# Altium PCB ALTAIR_PD_Squad_V26.5a_cut.PcbDoc (part 1 of 4)
Units mm, origin at the board's own origin, x right, y up, seen from the top; angles counter-clockwise.
Board outline 74 x 56 mm, 4 copper layers (Top Layer, Layer 2, Layer 3, Bottom Layer), stack 1.818 mm thick; 213 components, 155 nets, 610 pads, 404 vias.
Unrouted connection lines stored in the file: 6.
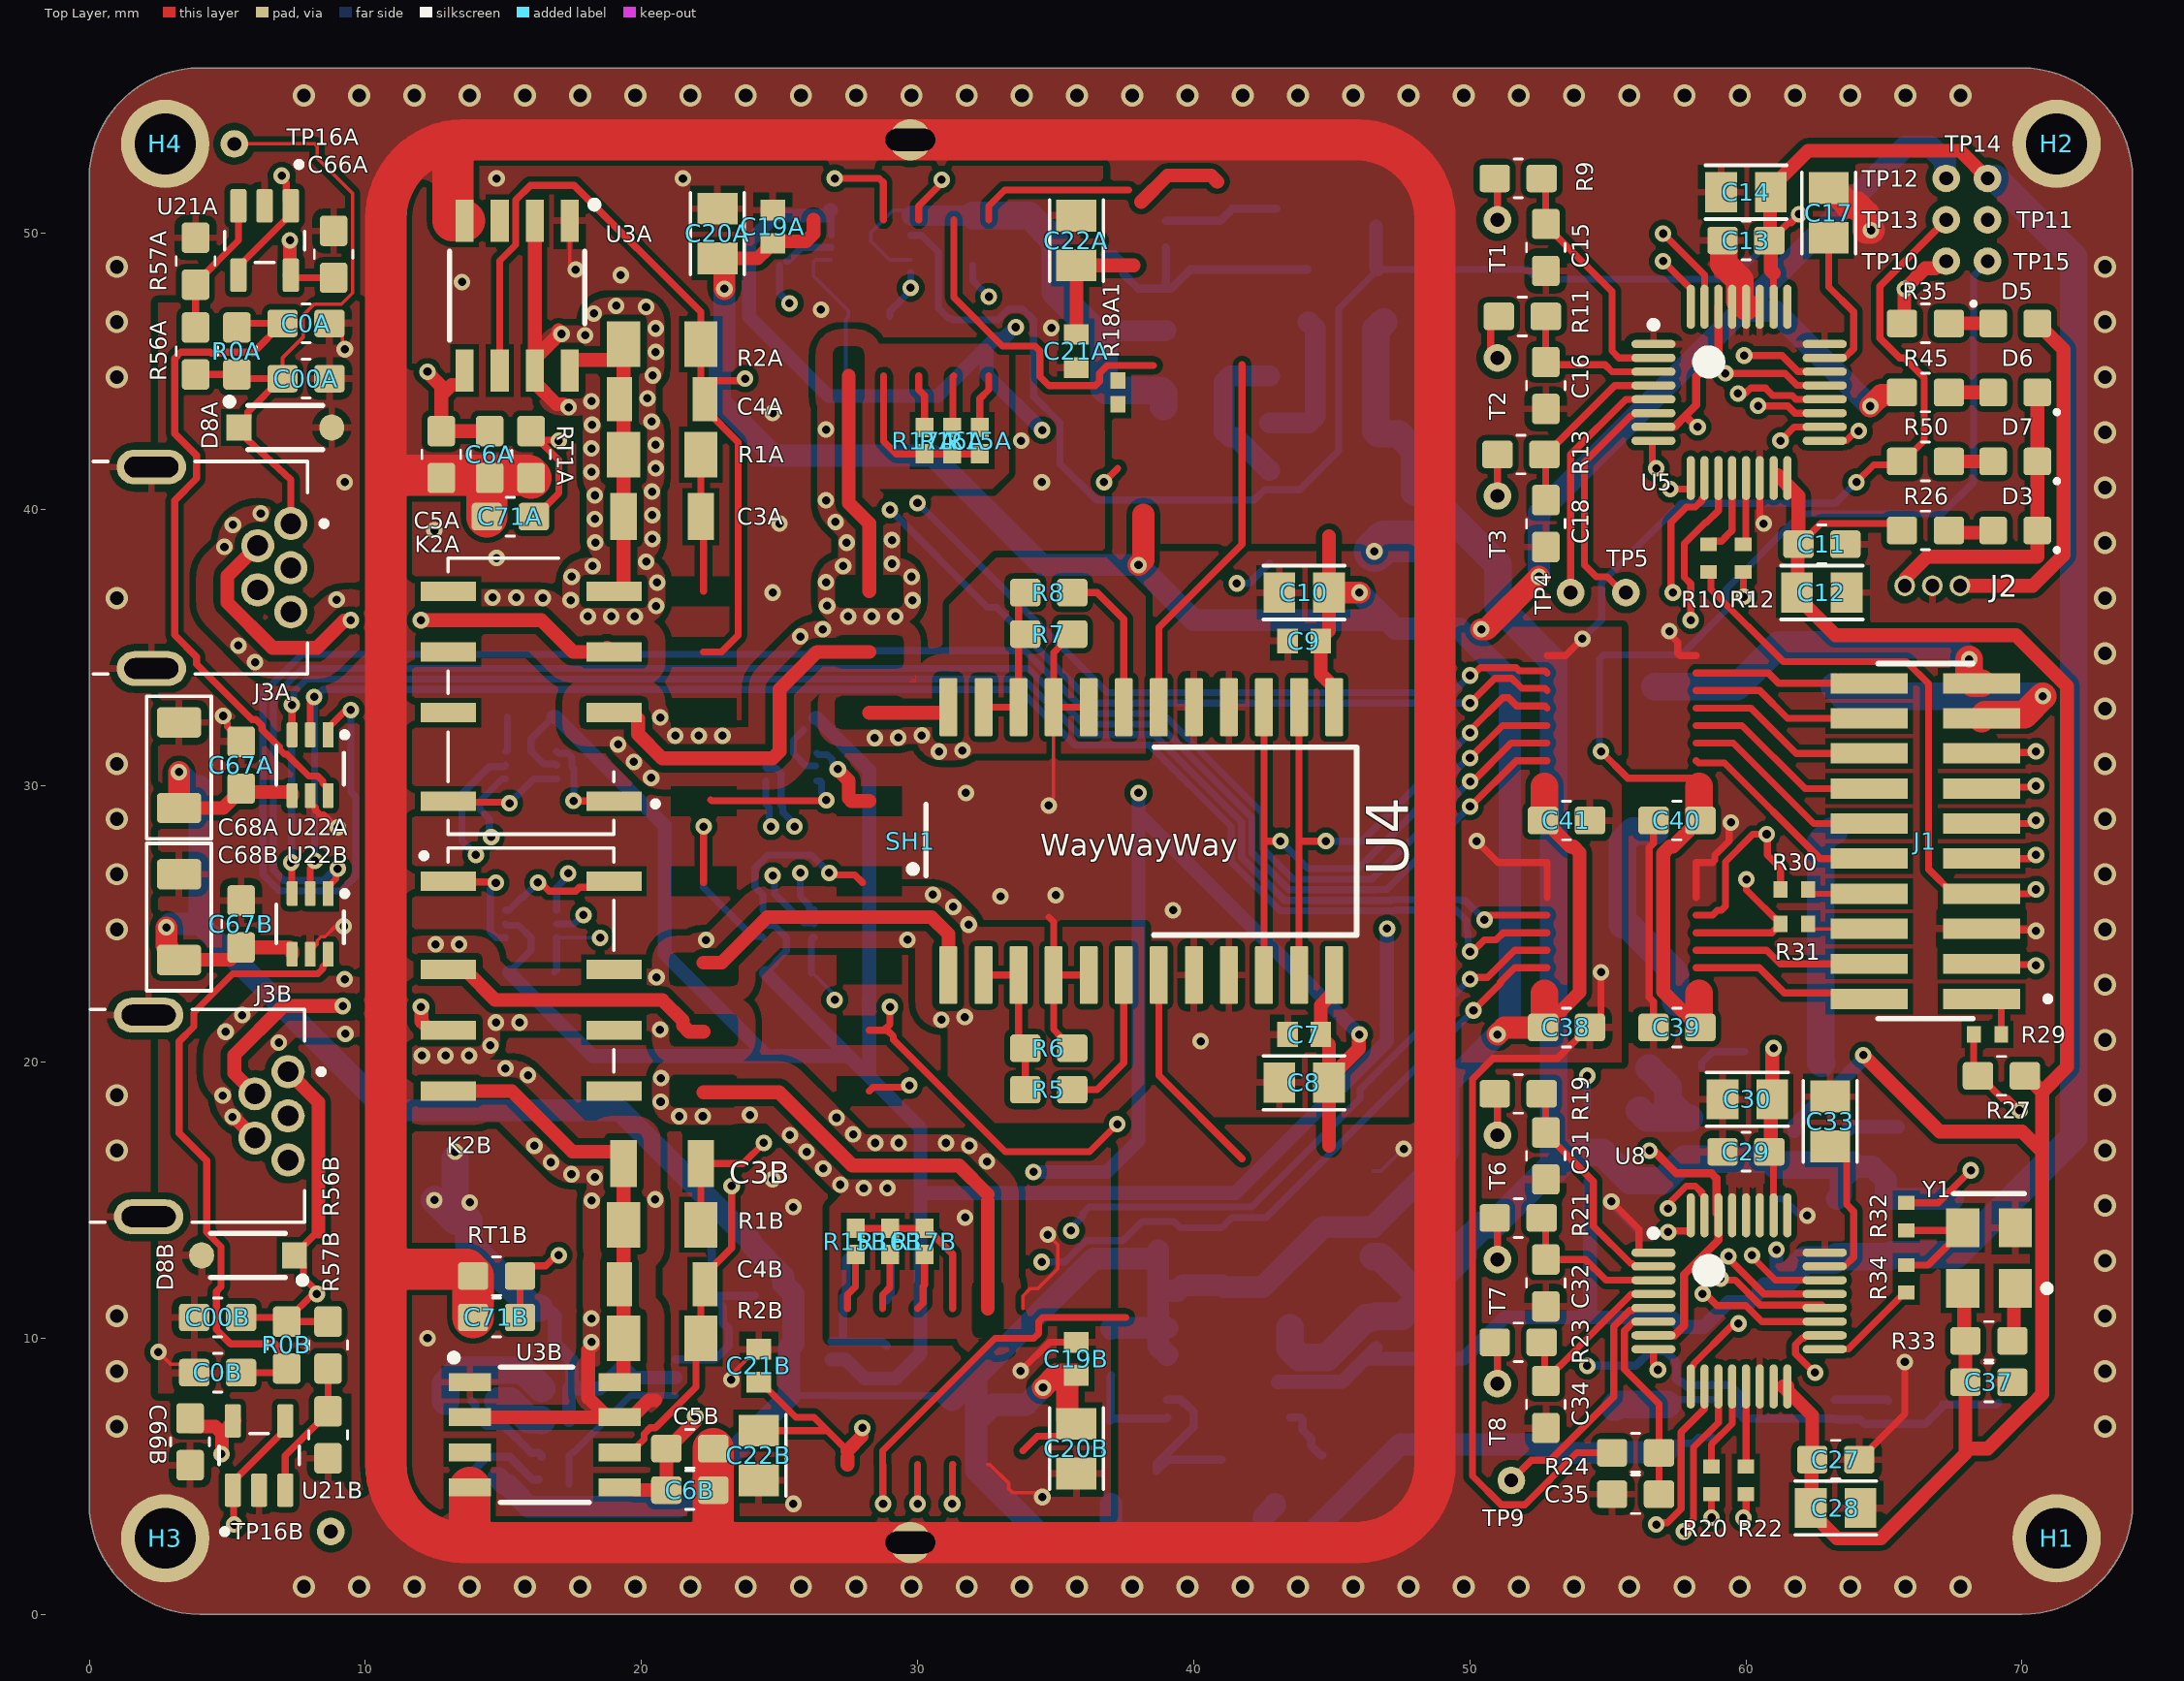
[diagram p0: Top Layer view]
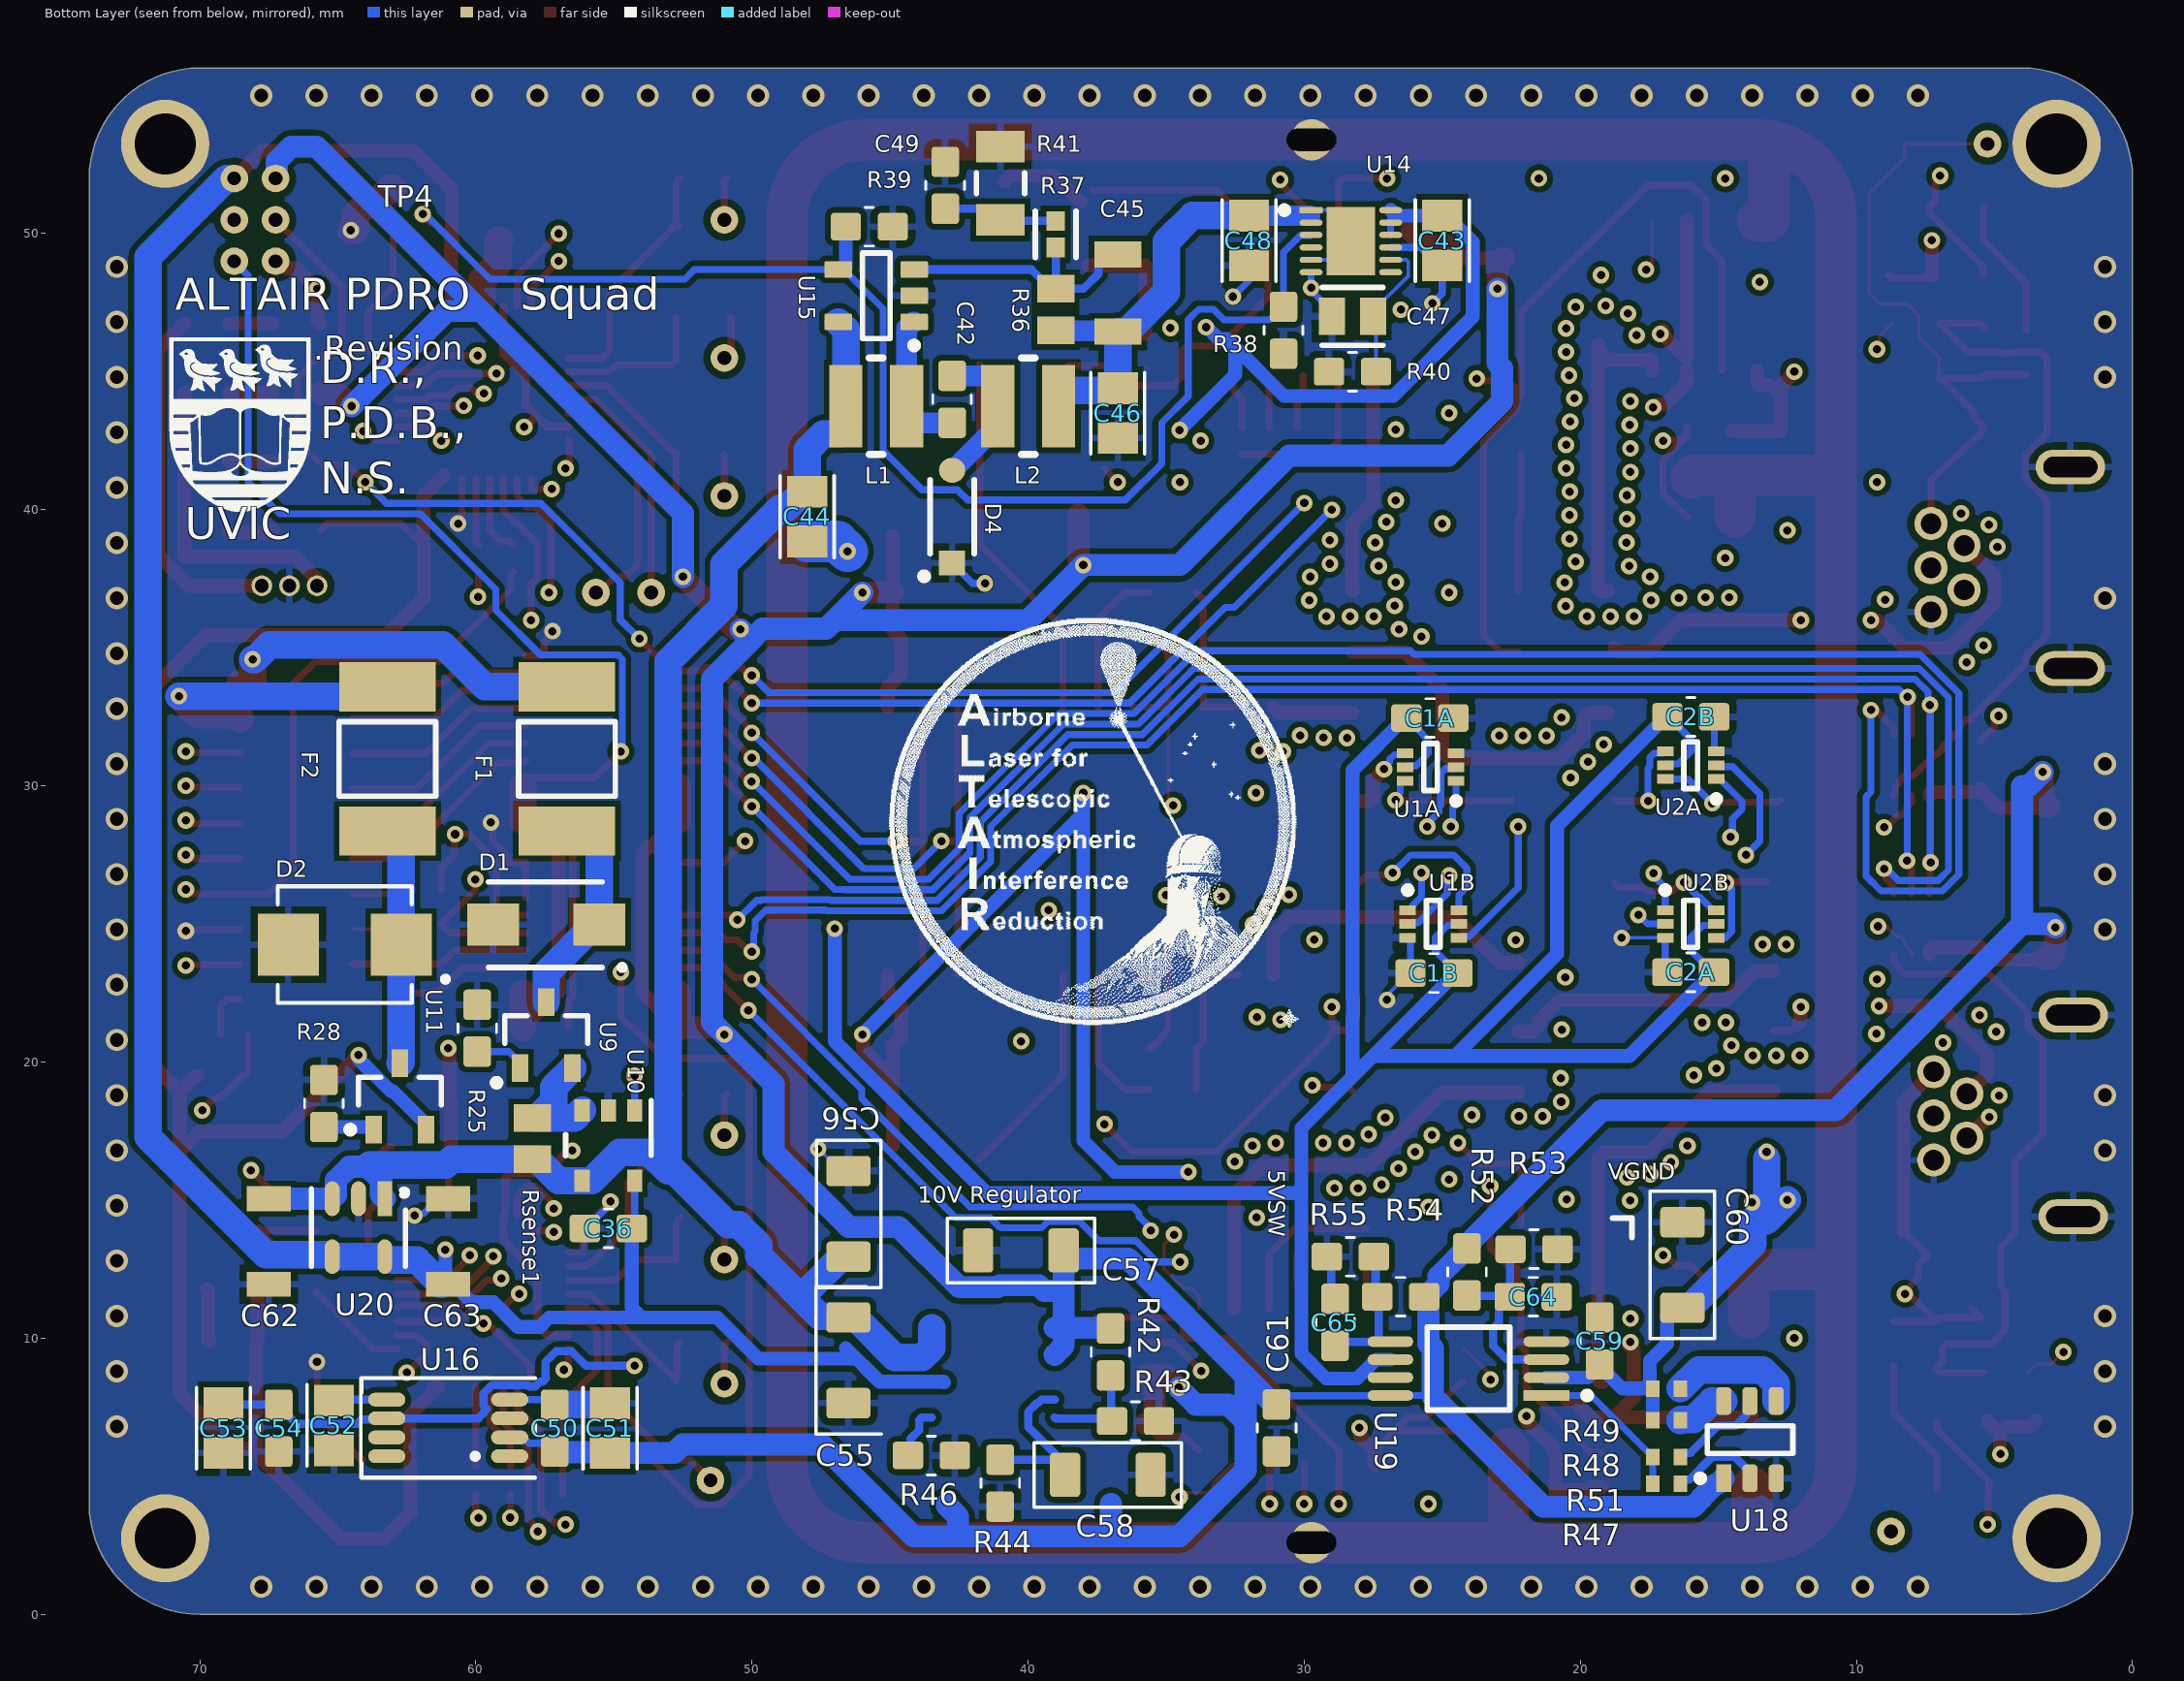
[diagram p1: Bottom Layer view, seen from below]
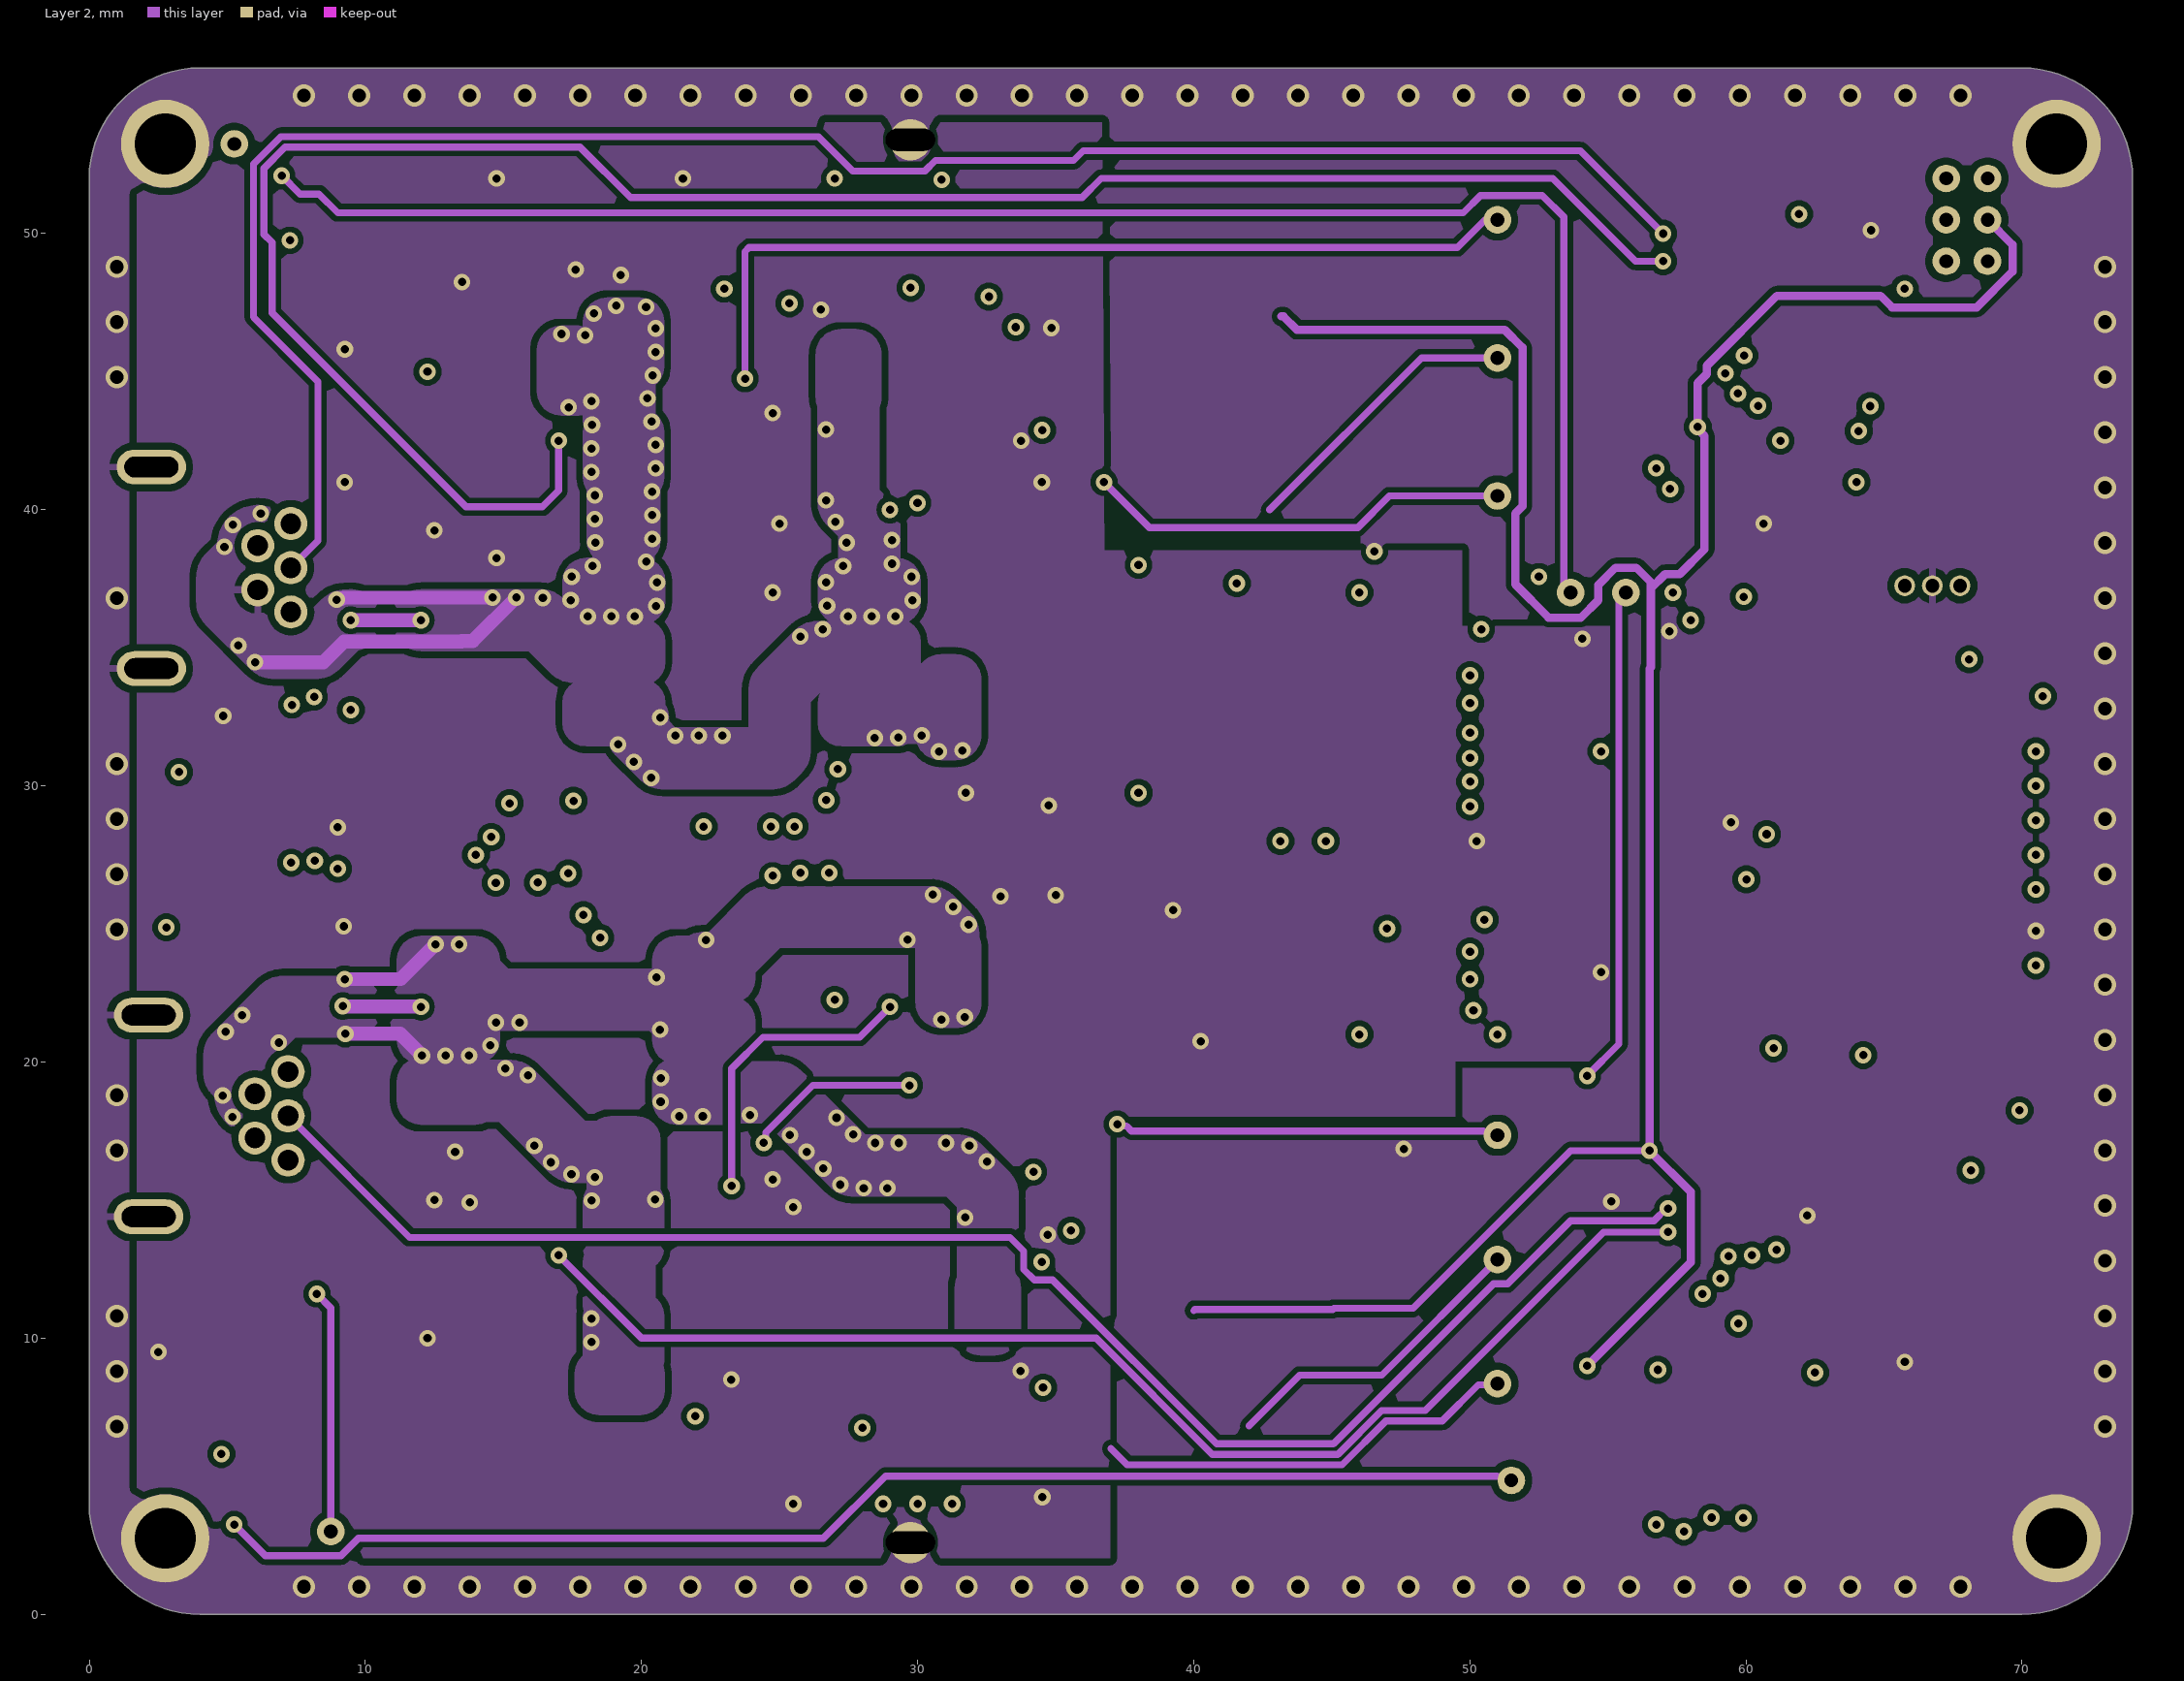
[diagram p2: Layer 2]
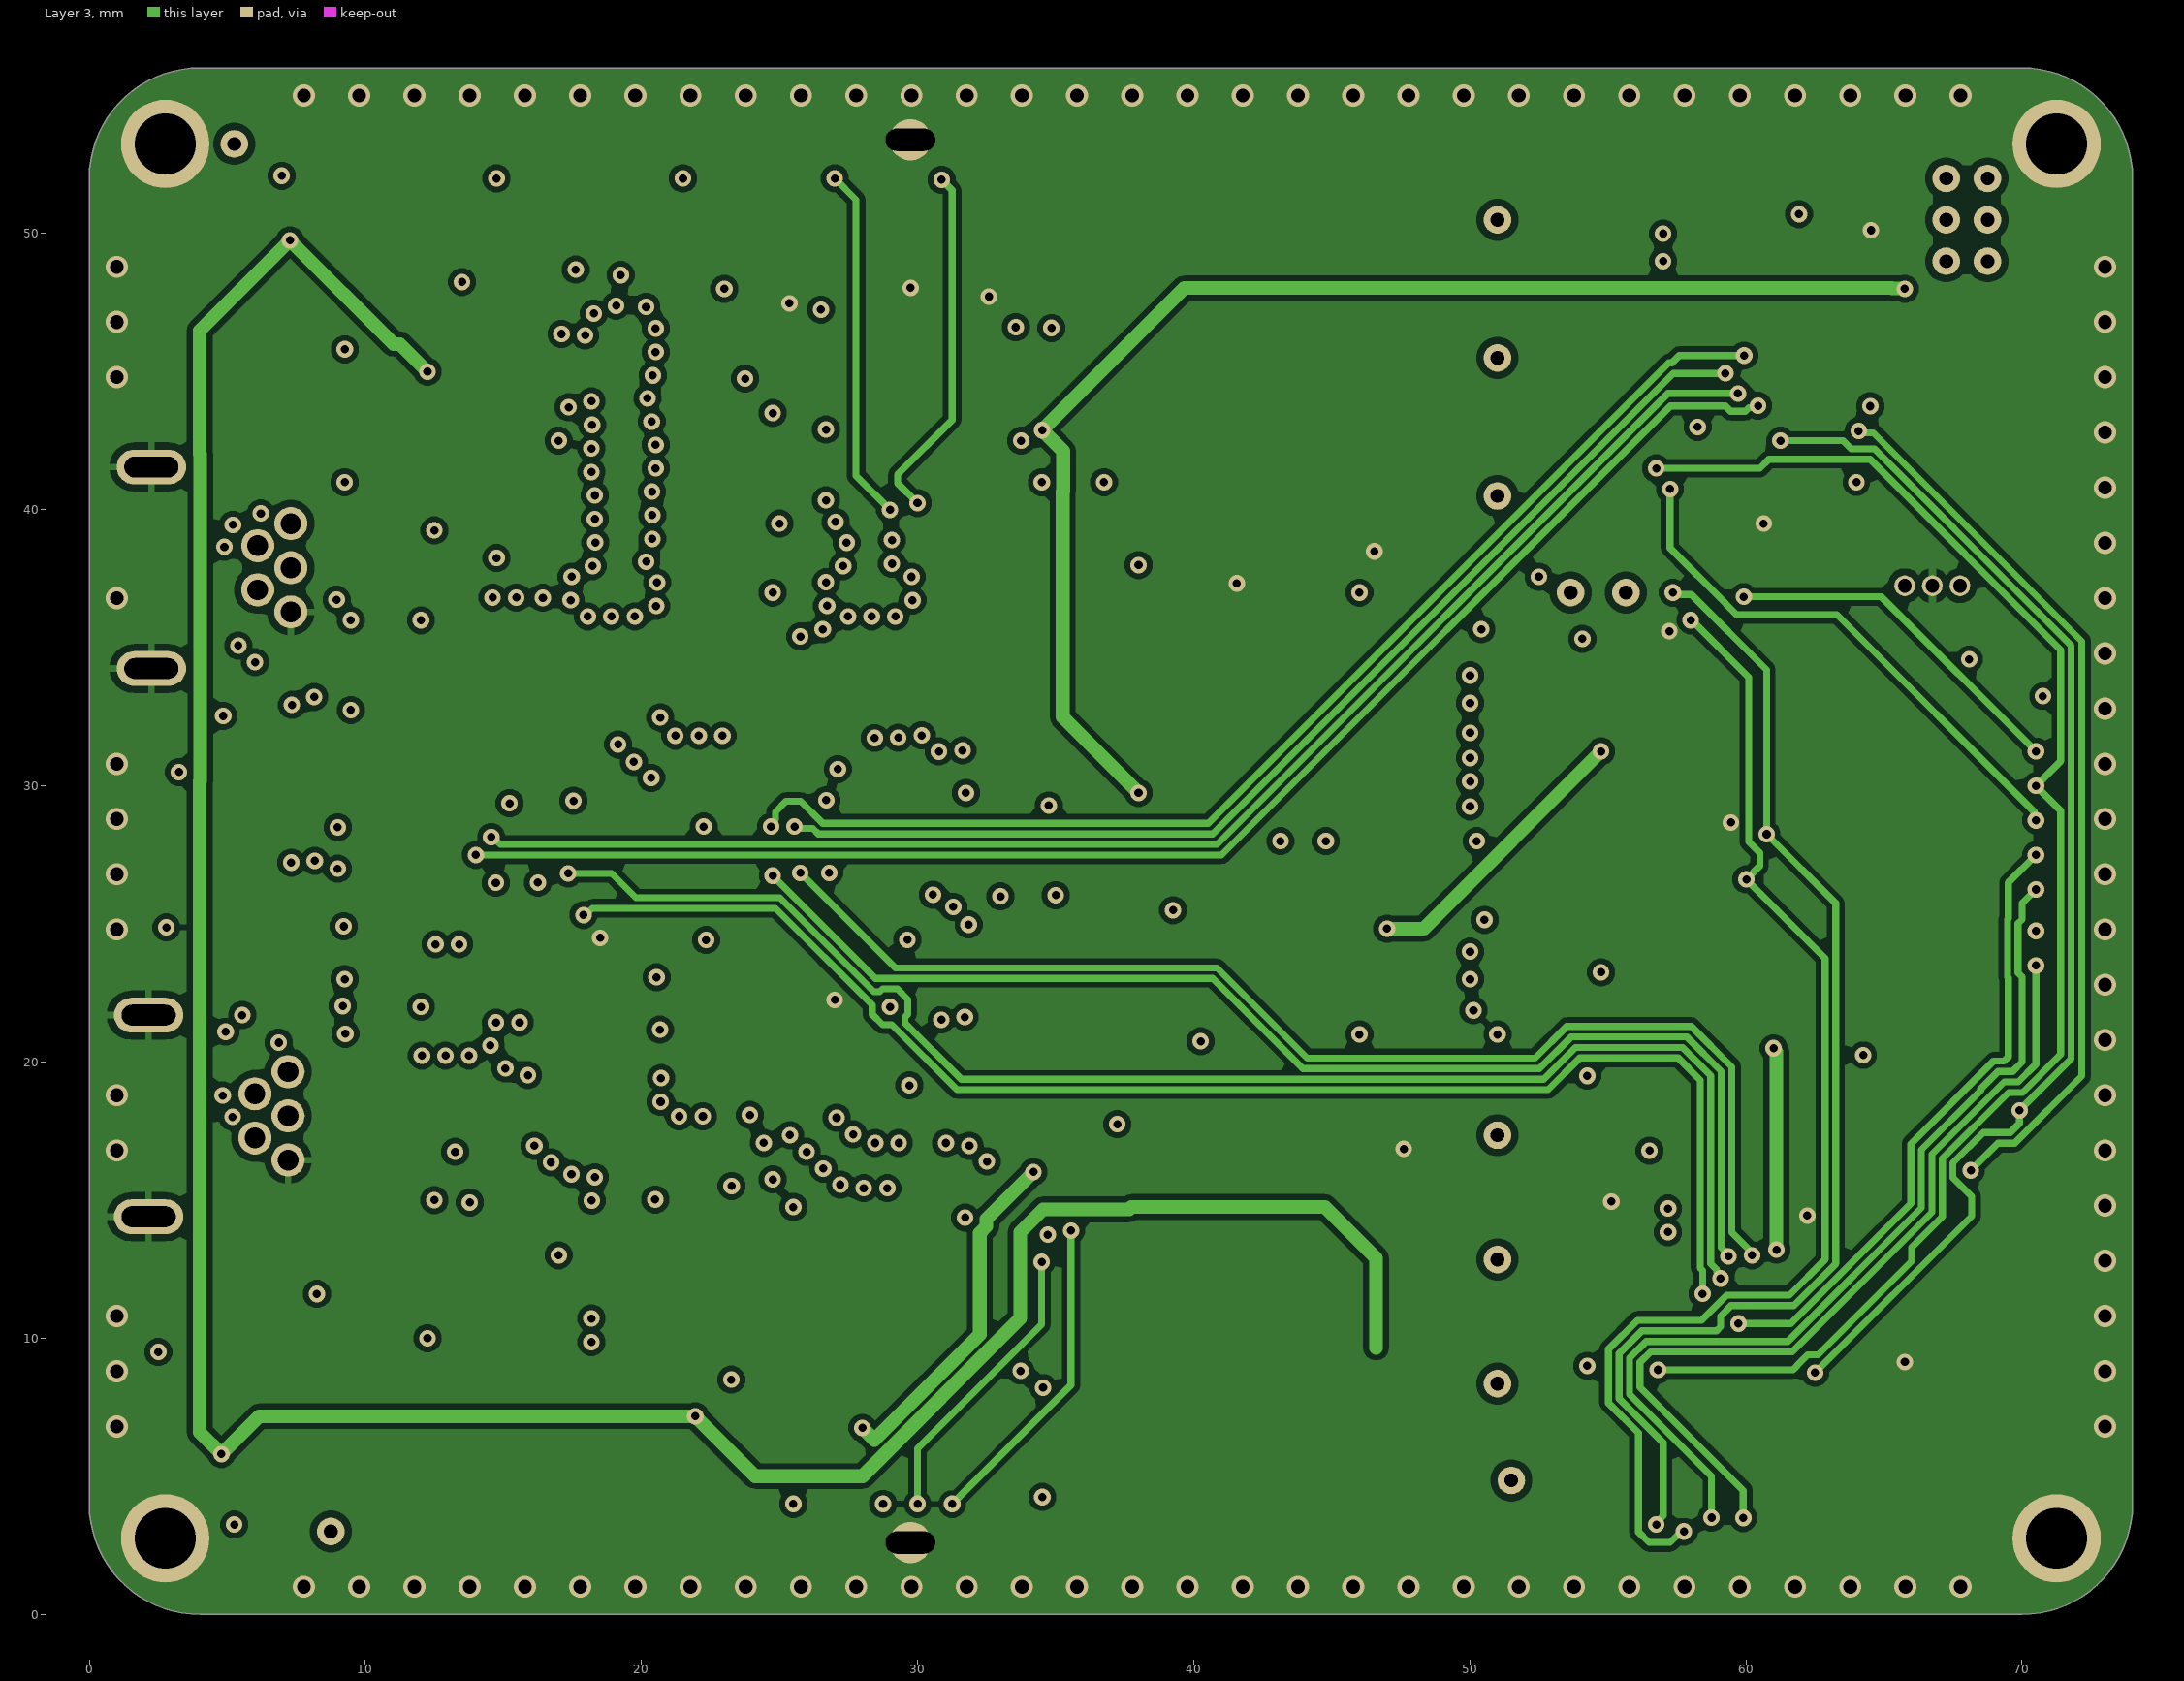
[diagram p3: Layer 3]
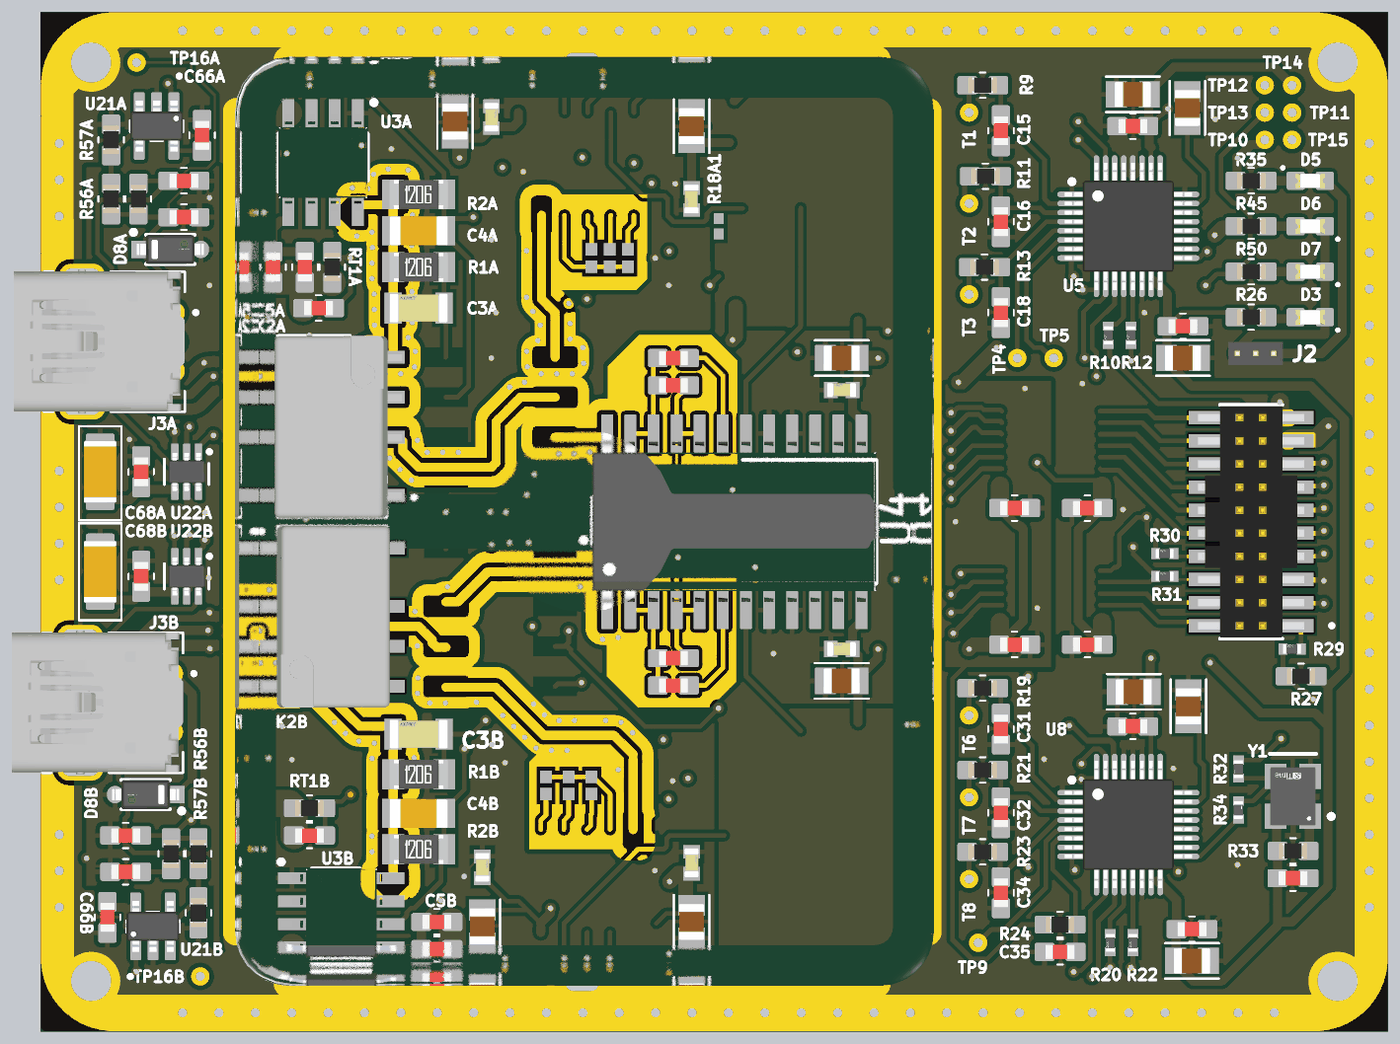
[diagram p6: 3D render of the assembled board from above, using the file's embedded part models]
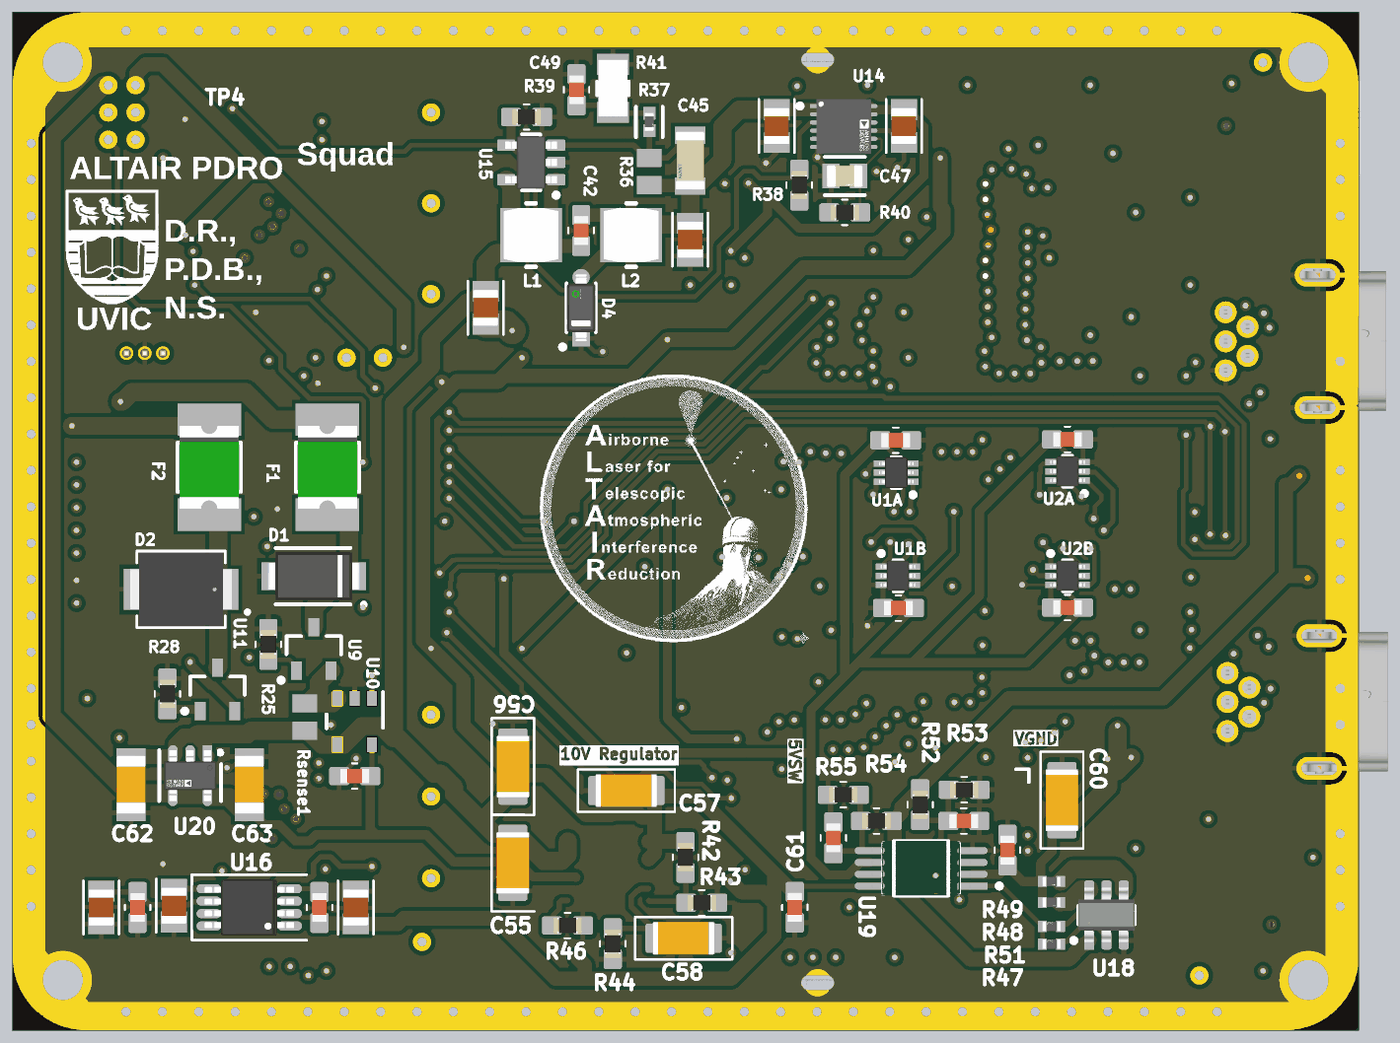
[diagram p7: 3D render of the assembled board from below, using the file's embedded part models]

## Layer stack, top to bottom
Top Solder: solder mask 0.0254, Solder Resist, Dk 3.5
Top Layer: signal copper 0.0356
Dielectric 2: prepreg 0.1702, FR-408, Dk 4.1
Dielectric 4: prepreg 0.0711, PP-006, Dk 4.1
Layer 2: signal copper 0.035
Dielectric 1: core 1.1938, FR-408, Dk 4.8
Layer 3: signal copper 0.035
Dielectric 5: prepreg 0.0711, PP-006, Dk 4.1
Dielectric 3: prepreg 0.1702, FR-408, Dk 4.1
Bottom Layer: signal copper 0.0356
Bottom Solder: solder mask 0.0254, Solder Resist, Dk 3.5

## Board outline
4,0 70,0 ccw(c70,4) 74,4 74,52 ccw(c70,52) 70,56 4,56 ccw(c4,52) 0,52 0,4 ccw(c4,4)

## Design rules (kind name [scope] priority, off if disabled: settings)
AssemblyTestPointUsage [All] p1: isadvanced=TRUE
AssemblyTestpoint [All] p1: isadvanced=TRUE testpointundercomponent=TRUE minsize=1.016 maxsize=2.54 preferedsize=1.524 minholesize=0 maxholesize=1.016 preferedholesize=0.813 testpointgrid=0.025 usegrid=TRUE gridtolerance=0 allowsidetop=TRUE allowsidebottom=TRUE
Clearance ViaNotInPad [IsVia vs IsPad and not InPadClass('AllowVia')] p1: isadvanced=TRUE gap=0.152 ignorepadtopadclearanceinfootprint=FALSE
Clearance SoldierGuard [InNamedPolygon('SOLDIER_GUARD_L01_P001')] p2 off: isadvanced=TRUE gap=0.19 ignorepadtopadclearanceinfootprint=FALSE
Clearance UsbGuard [InNamedPolygon('GUARD_L02_P002') or InNamedPolygon('GUARD_L03_P002') or InNamedPolygon('GUARD_LBS_P001')] p3: isadvanced=TRUE gap=0.2 ignorepadtopadclearanceinfootprint=FALSE
Clearance Clearance_3 [InNamedPolygon('SYS_DVDD_L01_P001') or InNamedPolygon('SYS_DVDD_L03_P001')] p4 off: isadvanced=TRUE gap=0.25 ignorepadtopadclearanceinfootprint=FALSE
Clearance Clearance_1 [(ExistsOnLayer('Layer 2') Or ExistsOnLayer('Layer 3')) vs (ExistsOnLayer('Layer 2') Or ExistsOnLayer('Layer 3'))] p5: gap=0.2 ignorepadtopadclearanceinfootprint=TRUE except(0: Arc-Hole Track-Hole SMDPad-Hole THPad-Hole Via-Hole Fill-Hole Poly-Hole Region-Hole Text-Hole; 0.127: Arc-Arc Arc-Track Arc-SMDPad Arc-Text Track-Track Track-SMDPad Track-Text SMDPad-SMDPad SMDPad-Text Text-Text; 0.22: Arc-Via Track-Via Via-Text; 0.254: Arc-THPad Track-THPad SMDPad-THPad SMDPad-Via THPad-THPad THPad-Via THPad-Fill THPad-Poly THPad-Region THPad-Text Via-Via Fill-Fill Fill-Poly Fill-Region Poly-Poly Poly-Region Region-Region Hole-Hole) sourcerule=55 cellrowname=All cellrowtype=0 cellcolname=All cellcoltype=0 innerlayers=TRUE
Clearance Clearance_2 [(ExistsOnLayer('Top Layer') Or ExistsOnLayer('Bottom Layer')) vs (ExistsOnLayer('Top Layer') Or ExistsOnLayer('Bottom Layer'))] p6: gap=0.2 ignorepadtopadclearanceinfootprint=TRUE except(0: Arc-Hole Track-Hole SMDPad-Hole THPad-Hole Via-Hole Fill-Hole Poly-Hole Region-Hole Text-Hole; 0.127: Arc-Arc Arc-Track Arc-SMDPad Arc-Text Track-Track Track-SMDPad Track-Text SMDPad-SMDPad SMDPad-Text Text-Text; 0.22: Arc-Via Track-Via Via-Text; 0.254: Arc-THPad Track-THPad SMDPad-THPad SMDPad-Via THPad-THPad THPad-Via THPad-Fill THPad-Poly THPad-Region THPad-Text Via-Via Fill-Fill Fill-Poly Fill-Region Poly-Poly Poly-Region Region-Region Hole-Hole) sourcerule=55 cellrowname=All cellrowtype=0 cellcolname=All cellcoltype=0 outerlayers=TRUE
Clearance [All] p7: gap=0.254 ignorepadtopadclearanceinfootprint=TRUE ismatrix=TRUE
ComponentClearance [All] p1: isadvanced=TRUE gap=0.254 collisioncheckmode=3 verticalgap=0.254 showdistances=FALSE
FabricationTestPointUsage [All] p1: isadvanced=TRUE valid=0 allowmultiple=FALSE
FabricationTestpoint [All] p1: isadvanced=TRUE side=3 testpointundercomponent=TRUE minsize=1.016 maxsize=2.54 preferedsize=1.524 minholesize=0 maxholesize=1.016 preferedholesize=0.813 testpointgrid=0.025 allowsidetop=TRUE allowsidebottom=TRUE usegrid=TRUE gridtolerance=0
FanoutControl Fanout_BGA [IsBGA] p1: isadvanced=TRUE bgadir=Out bgaviamode=Centered fanoutstyle=Auto fanoutdirection=Alternating viagrid=0.025 // Fanout_BGA (Default Rule)
FanoutControl Fanout_LCC [IsLCC] p2: isadvanced=TRUE bgadir=Out bgaviamode=Centered fanoutstyle=Auto fanoutdirection=Alternating viagrid=0.025 // Fanout_LCC (Default Rule)
FanoutControl Fanout_SOIC [IsSOIC] p3: isadvanced=TRUE bgadir=Out bgaviamode=Centered fanoutstyle=Auto fanoutdirection=Alternating viagrid=0.025 // Fanout_SOIC (Default Rule)
FanoutControl Fanout_Small [(CompPinCount < 5)] p4: isadvanced=TRUE bgadir=Out bgaviamode=Centered fanoutstyle=Auto fanoutdirection=OutThenIn viagrid=0.025 // Fanout_Small (Default Rule)
FanoutControl Fanout_Default [All] p5: isadvanced=TRUE bgadir=Out bgaviamode=Centered fanoutstyle=Auto fanoutdirection=Alternating viagrid=0.025 // Fanout_Default (Default Rule)
Height [All] p1: isadvanced=TRUE minheight=0 maxheight=25.4 prefheight=12.7
HoleSize [All] p1: isadvanced=TRUE absolutevalues=TRUE maxlimit=4 minlimit=0.2 maxpercent=80.000 minpercent=20.000
HoleToHoleClearance [All] p1: isadvanced=TRUE gap=0.407 allowstackedmicrovias=TRUE // From PCBWay Advanced Capabilities
LayerPairs [All] p1: isadvanced=TRUE enforce=TRUE
MinimumSolderMaskSliver [All] p1: isadvanced=TRUE minsoldermaskwidth=0.076 // From PCBWay Advanced Capabilities
NetAntennae [All] p1 off: isadvanced=TRUE netantennaetolerance=0
PasteMaskExpansion [All] p1: isadvanced=TRUE expansion=0
PlaneClearance [All] p1: isadvanced=TRUE clearance=0.508
PlaneConnect [All] p1: isadvanced=TRUE planeconnectstyle=Relief reliefexpansion=0.508 reliefentries=4 reliefconductorwidth=0.254 reliefairgap=0.254
PolygonConnect DirectConnectStructures [InComponent('*H*')] p1: isadvanced=TRUE connectstyle=Direct reliefconductorwidth=0.254 reliefentries=2 polygonreliefangle="0 Angle" airgapwidth=0.254 // Ensure direct connection for holes and shield
PolygonConnect PolygonConnectStyle_DCV [InPolygonClass('DirectConnectVias')] p2: isadvanced=TRUE thpad.connectstyle=Relief thpad.reliefconductorwidth=0.254 thpad.reliefentries=4 thpad.polygonreliefangle="90 Angle" thpad.airgapwidth=0.254 smdpad.connectstyle=Relief smdpad.reliefconductorwidth=0.254 smdpad.reliefentries=4 smdpad.polygonreliefangle="90 Angle" smdpad.airgapwidth=0.254 via.connectstyle=Direct via.reliefconductorwidth=0.254 via.reliefentries=2 via.polygonreliefangle="0 Angle" via.airgapwidth=0.254
PolygonConnect PolygonConnectStyle_DCE [InPolygonClass('DirectConnectEverything')] p3: isadvanced=TRUE connectstyle=Direct reliefconductorwidth=0.254 reliefentries=2 polygonreliefangle="0 Angle" airgapwidth=0.254
PolygonConnect [All] p4: connectstyle=Relief reliefconductorwidth=0.254 reliefentries=4 polygonreliefangle="90 Angle" airgapwidth=0.254
RoutingCorners [All] p1: isadvanced=TRUE cornerstyle=45-Degree minsetback=2.54 maxsetback=2.54
RoutingPriority [All] p1: isadvanced=TRUE routingpriority=0
RoutingVias RoutingViaStyle_3 [All] p1: isadvanced=TRUE holewidth=0.3 width=0.6 viastyle="Through Hole" minholewidth=0.3 minwidth=0.6 maxholewidth=0.711 maxwidth=1.27
RoutingVias [All] p2: holewidth=0.711 width=1.27 viastyle="Through Hole" minholewidth=0.711 minwidth=1.27 maxholewidth=0.711 maxwidth=1.27
ShortCircuit [All] p1: isadvanced=TRUE allowed=FALSE
SilkToSilkClearance [All] p1 off: isadvanced=TRUE silktosilkclearance=0.254
SilkToSolderMaskClearance [IsPad or IsPoly] p1: isadvanced=TRUE minsilkscreentomaskgap=0.15 clearancetoexposedcopper=TRUE
SolderMaskExpansion ExposeGuard [InNet('PD_A')] p1: isadvanced=TRUE expansion=1 istentingtop=FALSE
SolderMaskExpansion [All] p2: isadvanced=TRUE expansion=0 istentingtop=FALSE
SupplyNets "Schematic Supply Nets_4" [InNet('LEDNG')] p1: isadvanced=TRUE voltage=0.000
SupplyNets "Schematic Supply Nets" [InNet('LEDPG')] p2: isadvanced=TRUE voltage=0.000
SupplyNets "Schematic Supply Nets_3" [InNet('-11V_EN')] p3: isadvanced=TRUE voltage=0.000
SupplyNets "Schematic Supply Nets_5" [InNet('3V3')] p4: isadvanced=TRUE voltage=0.000
SupplyNets "Schematic Supply Nets_9" [InNet('A2V5')] p5: isadvanced=TRUE voltage=0.000
SupplyNets "Schematic Supply Nets_8" [InNet('-11V')] p6: isadvanced=TRUE voltage=0.000
SupplyNets "Schematic Supply Nets_7" [InNet('4V9')] p7: isadvanced=TRUE voltage=0.000
SupplyNets "Schematic Supply Nets_6" [InNet('10V')] p8: isadvanced=TRUE voltage=0.000
SupplyNets "Schematic Supply Nets_2" [InNet('SYS_GND')] p9: isadvanced=TRUE voltage=0.000
SupplyNets "Schematic Supply Nets_1" [InNet('A5VSW')] p10: isadvanced=TRUE voltage=0.000
UnRoutedNet [All] p1: isadvanced=TRUE
UnpouredPolygon [All] p1: isadvanced=TRUE
Width [All] p1: maxlimit=5 minlimit=0.127 preferedwidth=0.254 midlayer1_minwidth=0.254 midlayer2_minwidth=0.254 minimp=50.000000 maximp=50.000000 favimp=50.000000
4 further rules are at their usual default settings.

## Classes and differential pairs
channel class BIAS_IO: A B
component class B: C00B C0B C66B C67B C68B C71B D8B J3B J4_IOB R0B R56B R57B RT1B TP16B U21B U22B
component class A: C00A C0A C66A C67A C68A C71A D8A J3A J4_IOA R0A R56A R57A RT1A TP16A U21A U22A
component class ADCA: C11 C12 C13 C14 C15 C16 C17 C18 R9 R10 R11 R12 R13 T1 T2 T3 TP4 TP5 U5
channel class TIA_SWITCHES: A B
channel class Level_Shifter: A1 A2 B1 B2
channel class IVC_INTEGRATOR: A B
component class PWR-: C42 C43 C44 C45 C46 C47 C48 C49 D4 D5 L1 L2 R35 R36 R37 R38 R39 R40 R41 TP10 U14 U15
component class A1: R18A1
component class B: C19B C20B C21B C22B R15B R16B R17B
component class A: C19A C20A C21A C22A R15A R16A R17A
component class B: C1B C2B C3B C4B C5B C6B K2B R1B R2B U1B U2B U3B U13_Designator2
component class A: C1A C2A C3A C4A C5A C6A K2A R1A R2A U1A U2A U3A U13_Designator1
polygon class DirectConnectVias: 4V9_L01_P314 ACF_GUARDA ACF_GUARDB B_SYS_GND GUARDA0 GUARDA1 GUARDA2 GUARDA_L02_P289 GUARDA_L02_P293 GuardB1 GuardB2 GUARDB_L02_P294 GUARDB_L02_P312 IVC_GUARDA IVC_GUARDB L1_VGND L2_SYS_GND L3_SYS_GND TOP_GND
component class ADCB: C27 C28 C29 C30 C31 C32 C33 C34 C35 dr R19 R20 R21 R22 R23 R24 T6 T7 T8 TP9 U8
component class PWR+: C50 C51 C52 C53 C54 C55 C56 C57 C58 C59 C60 C61 C62 C63 C64 C65 D6 D7 R42 R43 R44 R45 R46 R47 R48 R49 R50 R51 R52 R53 R54 R55 TP11 TP12 TP13 TP14 TP15 U16 U18 U19 U20
component class ACF_INTEGRATOR: C7 C8 C9 C10 R5 R6 R7 R8 U4
component class INT: C36 C37 C38 C39 C40 C41 D1 D2 D3 F1 F2 H1 H2 H3 H4 J1 J2 R25 R26 R27 R28 R29 R30 R31 R32 R33 R34 Rsense1 SH1 U9 U10 U11 Y1

## Components (designator, comment, footprint, x,y, rotation, side; value= is the part's Value field where it differs from the comment)
C00A "TBD OPT" "CAP 0603 IPC MID DENSITY" 7.85,44.75 r180 top (schematic designator C00)
C0A "TBD OPT" "CAP 0603 IPC MID DENSITY" 7.85,46.75 r180 top (schematic designator C0)
C00B "TBD OPT" "CAP 0603 IPC MID DENSITY" 4.65,10.75 r0 top (schematic designator C00)
C0B "TBD OPT" "CAP 0603 IPC MID DENSITY" 4.65,8.75 r0 top (schematic designator C0)
C1A "0.1uF" "CAP 0603 IPC MID DENSITY" 25.448,32.459 r0 bottom (schematic designator C1)
C1B "0.1uF" "CAP 0603 IPC MID DENSITY" 25.301,23.221 r180 bottom (schematic designator C1)
C2A "0.1uF" "CAP 0603 IPC MID DENSITY" 16,23.25 r180 bottom (schematic designator C2)
C2B "0.1uF" "CAP 0603 IPC MID DENSITY" 16,32.5 r0 bottom (schematic designator C2)
C3A "300pF" "CAP 1206 NON-IPC KEMET NP0" 20.75,39.75 r0 top (schematic designator C3)
C3B "300pF" "CAP 1206 NON-IPC KEMET NP0" 20.75,16.321 r0 top (schematic designator C3)
C4A "10pF" "CAP 1206 UNKNOWN" 20.75,44 r0 top (schematic designator C4)
C4B "10pF" "CAP 1206 UNKNOWN" 20.75,11.955 r0 top (schematic designator C4)
C5A "1uF" "CAP 0603 IPC MID DENSITY" 12.75,42 r90 top (schematic designator C5)
C5B "1uF" "CAP 0603 IPC MID DENSITY" 21.75,6 r180 top (schematic designator C5)
C6A "0.1uF" "CAP 0603 IPC MID DENSITY" 14.5,42 r90 top (schematic designator C6)
C6B "0.1uF" "CAP 0603 IPC MID DENSITY" 21.75,4.5 r180 top (schematic designator C6)
C7 "0.1uF" "CAP 0603 NON-IPC KEMET X7R" 44,21 r0 top
C8 "10uF" "CAP 0805 IPC MID DENSITY" 44,19.25 r0 top
C9 "0.1uF" "CAP 0603 NON-IPC KEMET X7R" 44,35.25 r0 top
C10 "10uF" "CAP 0805 IPC MID DENSITY" 44,37 r0 top
C11 "0.1uF" "CAP 0603 IPC MID DENSITY" 62.75,38.75 r180 top
C12 "10uF" "CAP 0805 IPC MID DENSITY" 62.75,37 r180 top
C13 "0.1uF" "CAP 0603 IPC MID DENSITY" 60,49.75 r0 top
C14 "10uF" "CAP 0805 IPC MID DENSITY" 60,51.5 r0 top
C15 "2nF" "CAP 0603 IPC MID DENSITY" 52.75,49.5 r90 top
C16 "2nF" "CAP 0603 IPC MID DENSITY" 52.75,44.5 r90 top
C17 "10uF" "CAP 0805 IPC MID DENSITY" 63,50.75 r270 top
C18 "2nF" "CAP 0603 IPC MID DENSITY" 52.75,39.5 r90 top
C19A "0.1uF" "CAP 0603 NON-IPC KEMET X7R" 24.75,50.25 r270 top (schematic designator C19)
C19B "0.1uF" "CAP 0603 NON-IPC KEMET X7R" 35.75,9.25 r270 top (schematic designator C19)
C20A "10uF" "CAP 0805 IPC MID DENSITY" 22.75,50 r270 top (schematic designator C20)
C20B "10uF" "CAP 0805 IPC MID DENSITY" 35.75,6 r90 top (schematic designator C20)
C21A "0.1uF" "CAP 0603 NON-IPC KEMET X7R" 35.75,45.75 r90 top (schematic designator C21)
C21B "0.1uF" "CAP 0603 NON-IPC KEMET X7R" 24.25,9 r270 top (schematic designator C21)
C22A "10uF" "CAP 0805 IPC MID DENSITY" 35.75,49.75 r270 top (schematic designator C22)
C22B "10uF" "CAP 0805 IPC MID DENSITY" 24.25,5.75 r90 top (schematic designator C22)
C27 "0.1uF" "CAP 0603 IPC MID DENSITY" 63.25,5.6 r180 top
C28 "10uF" "CAP 0805 IPC MID DENSITY" 63.25,3.85 r180 top
C29 "0.1uF" "CAP 0603 IPC MID DENSITY" 60,16.75 r0 top
C30 "10uF" "CAP 0805 IPC MID DENSITY" 60.05,18.65 r0 top
C31 "2nF" "CAP 0603 IPC MID DENSITY" 52.75,16.6 r90 top
C32 "2nF" "CAP 0603 IPC MID DENSITY" 52.75,12 r90 top
C33 "10uF" "CAP 0805 IPC MID DENSITY" 63.05,17.85 r270 top
C34 "2nF" "CAP 0603 IPC MID DENSITY" 52.75,7.6 r90 top
C35 "2nF" "CAP 0603 IPC MID DENSITY" 56,4.35 r0 top
C36 "0.1uF" "CAP 0603 IPC MID DENSITY" 55.2,13.975 r180 bottom
C37 "0.1uF" "CAP 0603 IPC MID DENSITY" 68.8,8.4 r180 top
C38 "0.1uF" "CAP 0603 IPC MID DENSITY" 53.5,21.25 r180 top
C39 "0.1uF" "CAP 0603 IPC MID DENSITY" 57.5,21.25 r0 top
C40 "0.1uF" "CAP 0603 IPC MID DENSITY" 57.5,28.75 r0 top
C41 "0.1uF" "CAP 0603 IPC MID DENSITY" 53.5,28.75 r180 top
C42 "1uF" "CAP 0603 IPC MID DENSITY" 42.75,44 r90 bottom
C43 "10uF" "CAP 0805 IPC MID DENSITY" 25,49.75 r270 bottom
C44 "10uF" "CAP 0805 IPC MID DENSITY" 48,39.75 r90 bottom
C45 "330pF" "CAP 1206 NON-IPC KEMET NP0" 36.75,47.85 r90 bottom
C46 "10uF" "CAP 0805 IPC MID DENSITY" 36.75,43.5 r270 bottom
C47 "4.7uF" "CAP 0805 NON-IPC KEMET X5R" 28.25,47 r0 bottom
C48 "10uF" "CAP 0805 IPC MID DENSITY" 32,49.75 r270 bottom
C49 "1uF DNP" "CAP 0603 IPC MID DENSITY" 43,51.75 r90 bottom
C50 "0.1uF" "CAP 0603 IPC MID DENSITY" 57.139,6.743 r90 bottom
C51 "10uF" "CAP 0805 IPC MID DENSITY" 55.139,6.743 r270 bottom
C52 "10uF" "CAP 0805 IPC MID DENSITY" 65.139,6.843 r270 bottom
C53 "10uF" "CAP 0805 IPC MID DENSITY" 69.139,6.743 r90 bottom
C54 "0.1uF" "CAP 0603 IPC MID DENSITY" 67.139,6.743 r270 bottom
C55 "10uF" "CAP 1206 IPC LOW DENSITY" 46.51,9.197 r90 bottom
C56 "10uF" "CAP 1206 IPC LOW DENSITY" 46.5,14.5 r270 bottom
C57 "10uF" "CAP 1206 IPC LOW DENSITY" 40.26,13.175 r180 bottom
C58 "10uF" "CAP 1206 IPC LOW DENSITY" 37.11,5.05 r0 bottom
C59 "0.1uF" "CAP 0603 IPC MID DENSITY" 19.304,9.899 r270 bottom
C60 "10uF" "CAP 1206 IPC LOW DENSITY" 16.304,12.649 r270 bottom
C61 "1uF" "CAP 0603 IPC MID DENSITY" 31,6.75 r90 bottom
C62 "2.2uF" "CAP 1206 UNKNOWN" 67.5,13.5 r270 bottom
C63 "2.2uF" "CAP 1206 UNKNOWN" 61,13.5 r90 bottom
C64 "0.1uF" "CAP 0603 IPC MID DENSITY" 21.704,11.499 r0 bottom
C65 "0.1uF" "CAP 0603 IPC MID DENSITY" 28.879,10.574 r270 bottom
C66A "1uF" "CAP 0603 IPC MID DENSITY" 8.85,49.25 r270 top (schematic designator C66)
C66B "1uF" "CAP 0603 IPC MID DENSITY" 3.65,6.25 r90 top (schematic designator C66)
C67A "0.1uF" "CAP 0603 IPC MID DENSITY" 5.5,30.75 r270 top (schematic designator C67)
C67B "0.1uF" "CAP 0603 IPC MID DENSITY" 5.5,25 r270 top (schematic designator C67)
C68A "10uF" "CAP 1206 IPC LOW DENSITY" 3.25,30.75 r270 top (schematic designator C68)
C68B "10uF" "CAP 1206 IPC LOW DENSITY" 3.25,25.25 r270 top (schematic designator C68)
C71A "0.1uF" "CAP 0603 IPC MID DENSITY" 15.25,39.75 r0 top (schematic designator C71)
C71B "0.1uF" "CAP 0603 IPC MID DENSITY" 14.75,10.75 r0 top (schematic designator C71)
D1 "SMAJ12A" "DO-214AC SMA VISHAY" 57.45,24.975 r0 bottom
D2 "SMLVT3V3" SMB_STM 64.75,24.25 r0 bottom
D3 "RED" "LED 0603 MID DENSITY" 69.75,39.25 r0 top
D4 "MBR0520" "SOD-123 ONSEMI SMALL PADS" 42.75,39.75 r90 bottom
D5 "RED" "LED 0603 MID DENSITY" 69.75,46.75 r180 top
D6 "RED" "LED 0603 MID DENSITY" 69.75,44.25 r0 top
D7 "RED" "LED 0603 MID DENSITY" 69.75,41.75 r0 top
D8A "MMSZ4679 DNP" "SOD-123 ONSEMI SMALL PADS" 7.1,42.975 r0 top (schematic designator D8)
D8B "MMSZ4679 DNP" "SOD-123 ONSEMI SMALL PADS" 5.75,13 r180 top (schematic designator D8)
F1 "0ZCG0030FF2C" "POLYFUSE 1812 NON-IPC BELFUSE" 56.7,30.975 r270 bottom
F2 "0ZCG0030FF2C" "POLYFUSE 1812 NON-IPC BELFUSE" 63.2,30.975 r270 bottom
H1 "Mount-hole" M2#1 71.25,2.75 r0 top
H2 "Mount-hole" M2#2 71,53 r0 top
H3 "Mount-hole" M2#3 3,3 r0 top
H4 "Mount-hole" M2#4 3,53 r0 top
J1 "FTSH-110-01-X-DV-K-TR" SAMTEC_FTSH-110-01-X-DV-K-TR 66.501,28 r90 top
J2 "BC020-03-A-0200-0300-L-G" "JUMPER 3POS 1MM PITCH THT" 66.75,37.25 r0 top
J3A "USB-miniB" USB_MINIB_RIGHTANGLE 2.25,37.9 r270 top (schematic designator J3)
J3B "USB-miniB" USB_MINIB_RIGHTANGLE 2.15,18.05 r270 top (schematic designator J3)
K2A "3-1462037-1" RELAY_3-1462037-1 16,33.25 r180 top (schematic designator K2)
K2B "3-1462037-1" RELAY_3-1462037-1 16,22.75 r0 top (schematic designator K2)
L1 "10uH" "IND VLS3012CX-1 NONSTANDARD TDK" 45.5,43.75 r180 bottom
L2 "10uH" "IND VLS3012CX-1 NONSTANDARD TDK" 40,43.75 r180 bottom
R0A "TBD" "RES 0603 IPC MID DENSITY" 5.35,45.75 r90 top (schematic designator R0)
R0B "TBD" "RES 0603 IPC MID DENSITY" 7.15,9.75 r270 top (schematic designator R0)
R1A "10k" "RES 1206 IPC MID DENSITY" 20.75,42 r0 top (schematic designator R1)
R1B "10k" "RES 1206 IPC MID DENSITY" 20.75,14.11 r0 top (schematic designator R1)
R2A "1Meg" "RES 1206 IPC MID DENSITY" 20.75,46 r0 top (schematic designator R2)
R2B "1Meg" "RES 1206 IPC MID DENSITY" 20.75,9.994 r0 top (schematic designator R2)
R5 "CAP DNP" "CAP 0603 IPC MID DENSITY" 34.75,19 r180 top
R6 "TBD DNP" "CAP 0603 IPC MID DENSITY" 34.75,20.5 r180 top
R7 "TBD DNP" "CAP 0603 IPC MID DENSITY" 34.75,35.5 r180 top
R8 "CAP DNP" "CAP 0603 IPC MID DENSITY" 34.75,37 r180 top
R9 "2k" "RES 0603 IPC MID DENSITY" 51.75,52 r0 top
R10 "47R" "RES 0402 NON-IPC SEI" 58.65,38.25 r270 top
R11 "2k" "RES 0603 IPC MID DENSITY" 51.9,47 r0 top
R12 "47R" "RES 0402 NON-IPC SEI" 59.9,38.25 r270 top
R13 "2k" "RES 0603 IPC MID DENSITY" 51.85,42 r0 top
R15A "0R OPT" "RES 0402 IPC LOW DENSITY" 32.25,42.5 r90 top (schematic designator R15)
R15B "0R OPT" "RES 0402 IPC LOW DENSITY" 27.75,13.5 r270 top (schematic designator R15)
R16A "0R OPT" "RES 0402 IPC LOW DENSITY" 31.25,42.5 r90 top (schematic designator R16)
R16B "0R OPT" "RES 0402 IPC LOW DENSITY" 29,13.5 r270 top (schematic designator R16)
R17A "0R OPT" "RES 0402 IPC LOW DENSITY" 30.25,42.5 r90 top (schematic designator R17)
R17B "0R OPT" "RES 0402 IPC LOW DENSITY" 30.25,13.5 r270 top (schematic designator R17)
R18A1 "5.11k" "RES 0402 IPC MID DENSITY" 37.25,44.25 r270 top (schematic designator R18)
R19 "2k" "RES 0603 IPC MID DENSITY" 51.75,18.85 r0 top
R20 "47R" "RES 0402 NON-IPC SEI" 58.75,4.85 r270 top
R21 "2k" "RES 0603 IPC MID DENSITY" 51.75,14.35 r0 top
R22 "47R" "RES 0402 NON-IPC SEI" 60,4.85 r270 top
R23 "2k" "RES 0603 IPC MID DENSITY" 51.75,9.85 r0 top
R24 "2k" "RES 0603 IPC MID DENSITY" 56,5.85 r0 top
R25 "1k" "RES 0603 IPC MID DENSITY" 59.95,21.225 r270 bottom
R26 "1k" "RES 0603 IPC MID DENSITY" 66.5,39.25 r180 top
R27 "10k" "RES 0603 IPC MID DENSITY" 69.25,19.5 r180 top
R28 "1k" "RES 0603 IPC MID DENSITY" 65.5,18.5 r270 bottom
R29 "47R" "RES 0402 NON-IPC SEI" 68.75,21 r180 top
R30 "47R" "RES 0402 NON-IPC SEI" 61.75,26.25 r180 top
R31 "47R" "RES 0402 NON-IPC SEI" 61.75,25 r180 top
R32 "33R" "RES 0402 NON-IPC YAGEO" 65.8,14.4 r270 top
R33 "10k" "RES 0603 IPC MID DENSITY" 68.8,9.9 r180 top
R34 "33R" "RES 0402 NON-IPC YAGEO" 65.8,12.15 r90 top
R35 "1k" "RES 0603 IPC MID DENSITY" 66.5,46.75 r180 top
R36 "30k" "RES 0805 IPC HIGH DENSITY" 39,47.25 r270 bottom
R37 "1k" "RES 0402 IPC LOW DENSITY YAGEO" 39,49.979 r270 bottom
R38 "100k" "RES 0603 IPC MID DENSITY" 30.75,46.5 r270 bottom
R39 "100k" "RES 0603 IPC MID DENSITY" 45.75,50.25 r180 bottom
R40 "110k" "RES 0603 IPC MID DENSITY" 28.25,45 r0 bottom
R41 "1.5k" "RES 1206 NON-IPC VISHAY" 41,51.825 r270 bottom
R42 "300k" "RES 0603 IPC MID DENSITY" 37.01,9.5 r90 bottom
R43 "10k" "RES 0603 IPC MID DENSITY" 36.11,7 r0 bottom
R44 "100k" "RES 0603 IPC MID DENSITY" 41.01,4.75 r90 bottom
R45 "680R" "RES 0603 IPC MID DENSITY" 66.5,44.25 r180 top
R46 "0R" "RES 0603 IPC MID DENSITY" 43.5,5.75 r0 bottom
R47 "47R" "RES 0402 NON-IPC SEI" 16.879,4.724 r0 bottom
R48 "0.1R" "RES 0402 NON-IPC YAGEO" 16.879,7.024 r180 bottom
R49 "0.1R" "RES 0402 NON-IPC YAGEO" 16.879,8.174 r180 bottom
R50 "680R" "RES 0603 IPC MID DENSITY" 66.5,41.75 r180 top
R51 "47R" "RES 0402 NON-IPC SEI" 16.879,5.699 r0 bottom
R52 "2.32k" "RES 0603 IPC MID DENSITY" 24.104,12.399 r90 bottom
R53 "2.23k" "RES 0603 IPC MID DENSITY" 21.679,13.224 r0 bottom
R54 "10k" "RES 0603 IPC MID DENSITY" 26.504,11.499 r180 bottom
R55 "10k" "RES 0603 IPC MID DENSITY" 28.329,12.949 r180 bottom
R56A "1M" "RES 0603 IPC MID DENSITY" 3.85,45.75 r270 top (schematic designator R56)
R56B "1M" "RES 0603 IPC MID DENSITY" 8.65,9.75 r90 top (schematic designator R56)
R57A "1.1M" "RES 0603 IPC MID DENSITY" 3.85,49 r270 top (schematic designator R57)
R57B "1.1M" "RES 0603 IPC MID DENSITY" 8.65,6.5 r90 top (schematic designator R57)
Rsense1 "0.1" "RES 0805 IPC HIGH DENSITY" 57.95,17.225 r90 bottom
RT1A "NTC 0603 10K 1%" "RES 0603 IPC MID DENSITY" 16,42 r90 top value="NT 10K" (schematic designator RT1)
RT1B "NTC 0603 10K 1%" "RES 0603 IPC MID DENSITY" 14.75,12.25 r0 top value="NT 10K" (schematic designator RT1)
SH1 "Mount-hole" MS511-20 29.74,28 r90 top locked
T1 "Testpoint" "TESTPOINT THT" 51,50.5 r90 top (schematic designator TP1)
T2 "Testpoint" "TESTPOINT THT" 51,45.5 r90 top (schematic designator TP2)
T3 "Testpoint" "TESTPOINT THT" 51,40.5 r90 top (schematic designator TP3)
T6 "Testpoint" "TESTPOINT THT" 51,17.35 r90 top (schematic designator TP6)
T7 "Testpoint" "TESTPOINT THT" 51,12.85 r90 top (schematic designator TP7)
T8 "Testpoint" "TESTPOINT THT" 51,8.35 r90 top (schematic designator TP8)
TP4 "Testpoint" "TESTPOINT THT" 53.65,37 r90 top
TP5 "Testpoint" "TESTPOINT THT" 55.65,37 r90 top
TP9 "Testpoint" "TESTPOINT THT" 51.5,4.85 r90 top
TP10 "Testpoint" "TESTPOINT THT" 67.25,49 r90 top
TP11 "Testpoint" "TESTPOINT THT" 68.75,50.5 r0 top
TP12 "Testpoint" "TESTPOINT THT" 67.25,52 r90 top
TP13 "Testpoint" "TESTPOINT THT" 67.25,50.5 r90 top
TP14 "Testpoint" "TESTPOINT THT" 68.75,52 r90 top
TP15 "Testpoint" "TESTPOINT THT" 68.75,49 r0 top
TP16A "Testpoint" "TESTPOINT THT" 5.25,53.25 r90 top (schematic designator TP16)
TP16B "Testpoint" "TESTPOINT THT" 8.75,3 r90 top (schematic designator TP16)
U1A "DRV8210DRLR" SOT563 25.424,30.68 r0 bottom (schematic designator U1)
U1B "DRV8210DRLR" SOT563 25.325,25 r180 bottom (schematic designator U1)
U2A "DRV8210DRLR" SOT563 16,30.75 r0 bottom (schematic designator U2)
U2B "DRV8210DRLR" SOT563 16,25 r180 bottom (schematic designator U2)
U3A "OPA928DR" "8-SOIC 4MM WIDE MID DENSITY" 15.5,47.75 r270 top (schematic designator U3)
U3B "OPA928DR" "8-SOIC 4MM WIDE MID DENSITY" 16.5,6.5 r0 top (schematic designator U3)
U4 "ACF2101BU" "24-SOIC 7.6MM WIDE LOW DENSITY" 38.1,28 r90 top locked
U5 "ADS124S08IPBSR" "32TQFP 7X7MM IPC LOW DENSITY" 59.75,44.25 r0 top
U8 "ADS124S08IPBSR" "32TQFP 7X7MM IPC LOW DENSITY" 59.75,11.35 r0 top
U9 "SI2347DS-T1-GE3" SOT95P245X110-3N 57.45,20.975 r90 bottom
U10 "INA180A3IDBVT" DBV0005A_L 55.2,16.975 r270 bottom
U11 "SSM3J332R,LF" SOT95P245X110-3N 62.75,18.75 r90 bottom
U14 "LT3094EDD#PBF" "12DFN 3x3MM EP IPC MID DENSITY" 28.309,49.725 r180 bottom
U15 "LM2611AMF/NOPB" "SOT23-5 MID DENSITY" 45.5,47.75 r0 bottom
U16 "REF5025" "8-TSOP 0.65MM PITCH 3MM WIDTH IPC MID DENSITY" 61,6.75 r0 bottom
U18 "ZXTC2045E6" "SOT23-6 NON-IPC DIODES" 13.854,6.324 r90 bottom
U19 "OPA2182" "8-TSSOP 0.65MM PITCH 4.4MM WIDTH IPC MID DENSITY" 24.054,8.899 r0 bottom
U20 "ADP7142AUJZ-5.0-R7" "SOT23-5 HIGH DENSITY AD" 64.25,14 r270 bottom
U21A "TLV387DBVR" SOT95P280X145-5N 6.35,49.75 r270 top (schematic designator U21)
U21B "TLV387DBVR" SOT95P280X145-5N 6.15,5.75 r90 top (schematic designator U21)
U22A "DAC5311" "SOT363-6 MID DENSITY" 8,30.75 r270 top (schematic designator U22)
U22B "DAC5311" "SOT363-6 MID DENSITY" 8,25 r270 top (schematic designator U22)
Y1 "SIT1602Bx" "4PQFN NON-IPC SITIME" 68.8,12.9 r180 top

## Footprints (in the part's own frame and the unit in brackets; to place one, negate y for a bottom-side part, rotate by r counter-clockwise, add the part's x,y. Pads: shape width x height; smd on the part's side, far side on the other; paste and mask are expansions set on the pad)
"4PQFN NON-IPC SITIME" [mm] "FP-SiT1602-2-MFG"
  rect 1.2x1.4 smd paste+0 mask+0: 1(-0.95,1.1) 2(-0.95,-1.1) 3(0.95,-1.1) 4(0.95,1.1)
  silkscreen extent -2.23,-2.34 1.28,1.22, body extent -1.65,-1.9 1.65,1.9, height 0.25
"8-SOIC 4MM WIDE MID DENSITY" [mm]
  rect 1.525x0.65 smd: 1(-2.712,1.905) 2(-2.712,0.635) 3(-2.712,-0.635) 4(-2.712,-1.905) 5(2.712,-1.905) 6(2.712,-0.635) 7(2.712,0.635) 8(2.712,1.905)
  silkscreen extent -3.43,-2.45 1.6,2.92, body extent -3,-2.45 3,2.45, height 1.75
"8-TSOP 0.65MM PITCH 3MM WIDTH IPC MID DENSITY" [mm] "TSOP65P490X110-8N"
  oval 1.35x0.5 smd mask-0.02: 1(-2.225,1.025) 2(-2.225,0.345) 3(-2.225,-0.345) 4(-2.225,-1.025) 5(2.225,-1.025) 6(2.225,-0.345) 7(2.225,0.345) 8(2.225,1.025)
  silkscreen extent -3.15,-1.8 3.15,1.8, body extent -2.45,-1.55 2.45,1.55, height 1.1
"8-TSSOP 0.65MM PITCH 4.4MM WIDTH IPC MID DENSITY" [mm] "FP-PW0008A-IPC_B, Texas Instruments branding"
  rect 1.655x0.381 smd paste+0 mask+0: 1(-2.825,0.975)
  rrect100% 1.655x0.381 smd paste+0 mask+0: 2(-2.825,0.325) 3(-2.825,-0.325) 4(-2.825,-0.975) 5(2.825,-0.975) 6(2.825,-0.325) 7(2.825,0.325) 8(2.825,0.975)
  silkscreen extent -4.42,-1.5 1.5,1.5, body extent -3.2,-1.5 3.2,1.5, height 1.2
"12DFN 3x3MM EP IPC MID DENSITY" [mm] "Exposed pad, Analog Devices logo"
  rect 0.831x0.222 smd paste+0 mask+0: 1(-1.441,1.125)
  rrect100% 0.831x0.222 smd paste+0 mask+0: 2(-1.441,0.675) 3(-1.441,0.225) 4(-1.441,-0.225) 5(-1.441,-0.675) 6(-1.441,-1.125) 7(1.441,-1.125) 8(1.441,-0.675) 9(1.441,-0.225) 10(1.441,0.225) 11(1.441,0.675) 12(1.441,1.125)
  rect 1.75x2.48 smd paste-1000 mask-0.05: 13(0,0)
  silkscreen extent -2.53,1 -2.28,1.25, body extent -1.5,-1.5 1.5,1.5, height 0.8
"24-SOIC 7.6MM WIDE LOW DENSITY" [mm] "SOIC, 24-Leads, Body 15.6x7.6mm, Pitch 1.27mm, IPC Low Density"
  rrect15% 2.1x0.65 smd: 1(-4.85,6.985) 2(-4.85,5.715) 3(-4.85,4.445) 4(-4.85,3.175) 5(-4.85,1.905) 6(-4.85,0.635) 7(-4.85,-0.635) 8(-4.85,-1.905) 9(-4.85,-3.175) 10(-4.85,-4.445) 11(-4.85,-5.715) 12(-4.85,-6.985) 13(4.85,-6.985) 14(4.85,-5.715) 15(4.85,-4.445) 16(4.85,-3.175) 17(4.85,-1.905) 18(4.85,-0.635) 19(4.85,0.635) 20(4.85,1.905) 21(4.85,3.175) 22(4.85,4.445) 23(4.85,5.715) 24(4.85,6.985)
  silkscreen extent -3.4,-7.8 3.4,8.4, body extent -5.32,-7.8 5.33,7.8, height 2.71
"32TQFP 7X7MM IPC LOW DENSITY" [mm] "TSQFP50P700X700X120-32M"
  oval 1.6x0.3 smd mask-0.035: 1(-3.1,1.75) 2(-3.1,1.25) 3(-3.1,0.75) 4(-3.1,0.25) 5(-3.1,-0.25) 6(-3.1,-0.75) 7(-3.1,-1.25) 8(-3.1,-1.75) 17(3.1,-1.75) 18(3.1,-1.25) 19(3.1,-0.75) 20(3.1,-0.25) 21(3.1,0.25) 22(3.1,0.75) 23(3.1,1.25) 24(3.1,1.75)
  oval 0.3x1.6 smd mask-0.035: 9(-1.75,-3.1) 10(-1.25,-3.1) 11(-0.75,-3.1) 12(-0.25,-3.1) 13(0.25,-3.1) 14(0.75,-3.1) 15(1.25,-3.1) 16(1.75,-3.1) 25(1.75,3.1) 26(1.25,3.1) 27(0.75,3.1) 28(0.25,3.1) 29(-0.25,3.1) 30(-0.75,3.1) 31(-1.25,3.1) 32(-1.75,3.1)
  silkscreen extent -3.22,0.8 -0.8,2.57, body extent -3.5,-3.5 3.5,3.5, height 1.2
"CAP 0603 IPC MID DENSITY" [mm]
  rrect25% 1.1x1 smd: 1(-0.85,0) 2(0.85,0)
  silkscreen extent -0.15,-0.7 0.15,0.7, body extent -0.8,-0.4 0.8,0.4, height 0.3
"CAP 0603 NON-IPC KEMET X7R" [mm]
  rect 0.75x0.9 smd paste+0 mask+0: 1(-0.6,0) 2(0.6,0)
  body extent -1.2,-0.6 1.2,0.6, height 0.25
"CAP 0805 IPC MID DENSITY" [mm]
  rect 1.15x1.45 smd paste+0 mask+0: 1(-0.9,0) 2(0.9,0)
  silkscreen extent -1.48,-0.97 1.48,0.97, body extent -1,-0.7 1,0.7, height 1.22
"CAP 0805 NON-IPC KEMET X5R" [mm]
  rect 0.95x1.35 smd paste+0 mask+0: 1(-0.75,0) 2(0.75,0)
  silkscreen extent -1.1,-1.05 1.1,1.05, body extent -1,-0.63 1,0.63, height 1.4
"CAP 1206 IPC LOW DENSITY" [mm]
  rrect25% 1.1x1.6 smd: 1(-1.55,0) 2(1.55,0)
  silkscreen extent -2.67,-1.2 2.67,1.17, body extent -1.7,-0.9 1.7,0.9, height 1.8
"CAP 1206 NON-IPC KEMET NP0" [mm]
  rect 0.95x1.7 smd paste+0 mask+0: 1(-1.4,0) 2(1.4,0)
  body extent -2,-1 2,1, height 0.25
"CAP 1206 UNKNOWN" [mm] "Ceramic Capacitors, body 3.2x1.6mm, WCAP-CSGP_1206_L3.2W1.6H0.8"
  rect 0.9x1.6 smd: 1(-1.55,0) 2(1.55,0)
  body extent -1.6,-0.8 1.6,0.8, height 0.8
DBV0005A_L [mm]
  rect 0.8x0.55 smd paste+0 mask+0.051: 1(-1.275,0.95) 2(-1.275,0) 3(-1.275,-0.95) 4(1.275,-0.95) 5(1.275,0.95)
  silkscreen extent -1.63,-1.55 0.38,1.55
"DO-214AC SMA VISHAY" [mm]
  rect 1.88x1.52 smd mask+0: 1(-1.93,0) 2(1.93,0)
  silkscreen extent -2.82,-1.55 2.1,1.62, body extent -2.55,-1.33 2.55,1.33, height 2.29
"IND VLS3012CX-1 NONSTANDARD TDK" [mm]
  rect 1.2x3 smd mask+0: 1(-1.1,0) 2(1.1,0)
  silkscreen extent -0.25,-1.75 0.25,1.75, body extent -1.5,-1.51 1.5,1.51, height 1.19
"JUMPER 3POS 1MM PITCH THT" [mm] "GCT BC020-03-A-0200-0300-L-G"
  round 0.75 hole 0.5: 1(-1,0) 2(0,0) 3(1,0)
  body extent -1.5,-0.64 1.5,0.64, height 4.3
"LED 0603 MID DENSITY" [mm]
  rrect25% 1x1 smd: 1(0.8,0) 2(-0.8,0)
  silkscreen extent 1.46,-0.76 1.56,-0.66, body extent -0.8,-0.4 0.8,0.4, height 0.7
M2#1 [mm]
  round 3.2 hole 2.2: 1(0,0)
M2#2 [mm]
  round 3.2 hole 2.2: 1(0.25,0.25)
M2#3 [mm]
  round 3.2 hole 2.2: 1(-0.25,-0.25)
M2#4 [mm]
  round 3.2 hole 2.2: 1(-0.25,0.25)
MS511-20 [mm]
  round 1.5 hole 0.8 slot 1.8 at 90 deg: 1(-25.4,0) 1(25.4,0)
  Top Layer lines w0.2: -25.527,5.334 -25.4,5.207
  Top Layer lines w1.5: -22.55,18.998 ccw(c-22.55,16.148) -25.4,16.2 -25.4,0 -25.4,-16.2 ccw(c-22.55,-16.148) -22.55,-18.998 22.55,-18.998 ccw(c22.55,-16.148) 25.4,-16.2 25.4,0 25.4,16.2 ccw(c22.55,16.148) 22.55,18.998 -22.55,18.998
  body extent -25.53,-19.33 25.57,19.07, height 6.51
"POLYFUSE 1812 NON-IPC BELFUSE" [mm]
  rect 1.78x3.5 smd mask+0: 1(-2.615,0) 2(2.615,0)
  silkscreen extent -1.35,-1.75 1.35,1.75, body extent -2.27,-1.62 2.27,1.62, height 0.7
RELAY_3-1462037-1 [mm]
  rect 2x0.7 smd paste+0 mask+0.102: 1(-3,3.8) 2(-3,0.6) 3(-3,-1.6) 4(-3,-3.8) 5(3,-3.8) 6(3,-1.6) 7(3,0.6) 8(3,3.8)
  silkscreen extent -4.6,-5 3,5, body extent -3.85,-4.97 3.93,5.03, height 5.66
"RES 0402 IPC LOW DENSITY" [mm]
  rect 0.7x0.65 smd: 1(-0.475,0) 2(0.475,0)
  body extent -0.53,-0.27 0.53,0.28, height 0.4
"RES 0402 IPC LOW DENSITY YAGEO" [mm]
  rect 0.715x0.672 smd paste+0 mask+0: 1(-0.479,0) 2(0.479,0)
  silkscreen extent -0.84,-0.74 0.84,0.74, body extent -0.5,-0.25 0.5,0.25, height 0.4
"RES 0402 IPC MID DENSITY" [mm] "Chip Resistor, 2-Leads, Body 1.00x0.50mm, IPC Medium Density"
  rect 0.6x0.55 smd: 1(-0.425,0) 2(0.425,0)
  body extent -0.53,-0.27 0.53,0.28, height 0.4
"RES 0402 NON-IPC SEI" [mm]
  rect 0.5x0.6 smd paste+0 mask+0: 1(-0.5,0) 2(0.5,0)
  body extent -0.85,-0.4 0.85,0.4, height 0.25
"RES 0402 NON-IPC YAGEO" [mm]
  rect 0.5x0.6 smd paste+0 mask+0: 1(-0.5,0) 2(0.5,0)
  body extent -0.85,-0.4 0.85,0.4, height 0.25
"RES 0603 IPC MID DENSITY" [mm]
  rrect25% 1.1x1 smd: 1(-0.85,0) 2(0.85,0)
  silkscreen extent -0.15,-0.7 0.15,0.7, body extent -0.77,-0.43 0.78,0.43, height 0.44
"RES 0805 IPC HIGH DENSITY" [mm] "Chip Resistor, 2-Leads, Body 2.00x1.25mm, IPC High Density"
  rect 1x1.35 smd: 1(-0.75,0) 2(0.75,0)
  body extent -1.1,-0.72 1.1,0.72, height 0.6
"RES 1206 IPC MID DENSITY" [mm] "Chip Resistor, 2-Leads, Body 3.13x1.55mm, IPC Medium Density"
  rect 1.2x1.65 smd: 1(-1.4,0) 2(1.4,0)
  body extent -1.6,-0.8 1.6,0.8, height 0.6
"RES 1206 NON-IPC VISHAY" [mm]
  rect 1.15x1.75 smd paste+0 mask+0: 1(-1.325,0) 2(1.325,0)
  silkscreen extent -0.38,-0.87 0.38,0.87, body extent -1.6,-0.8 1.6,0.8, height 0.65
SAMTEC_FTSH-110-01-X-DV-K-TR [mil]
  rect 29x110 smd paste+0 mask+4.02: 01(-225,-80) 02(-225,80) 03(-175,-80) 04(-175,80) 05(-125,-80) 06(-125,80) 07(-75,-80) 08(-75,80) 09(-25,-80) 10(-25,80) 11(25,-80) 12(25,80) 13(75,-80) 14(75,80) 15(125,-80) 16(125,80) 17(175,-80) 18(175,80) 19(225,-80) 20(225,80)
  silkscreen extent -253,-178 253,68, body extent -250,-115 250,115, height 242
SMB_STM [mil]
  rect 87x89 smd paste+0 mask+0: 1(-80.5,0) 2(80.5,0)
  silkscreen extent -96,-83 96,83, body extent -110,-78 110,78, height 104
"SOD-123 ONSEMI SMALL PADS" [mm]
  rect 0.9x0.95 smd paste+0 mask+0: 1(-1.68,0)
  rrect100% 0.9x0.95 smd paste+0 mask+0: 2(1.68,0)
  silkscreen extent -2.28,-0.8 1.35,1.14, body extent -1.84,-0.8 1.84,0.8, height 1.35
"SOT23-5 HIGH DENSITY AD" [mm] "FP-UJ-5-IPC_C"
  rect 1.254x0.532 smd paste+0 mask+0: 1(-1.05,0.95)
  rrect100% 1.254x0.532 smd paste+0 mask+0: 2(-1.05,0) 3(-1.05,-0.95) 4(1.05,-0.95) 5(1.05,0.95)
  silkscreen extent -1.4,-1.7 1.4,1.75, body extent -1.4,-1.45 1.4,1.45, height 1
"SOT23-5 MID DENSITY" [mm] "SOT23, 5-Leads, Body 3.05x1.75mm, Pitch 0.95mm, IPC Medium Density"
  rrect17% 1x0.6 smd: 1(-1.375,0.95) 2(-1.375,0) 3(-1.375,-0.95) 4(1.375,-0.95) 5(1.375,0.95)
  silkscreen extent -1.5,-1.55 0.5,1.92, body extent -1.42,-1.46 1.42,1.46, height 1.08
"SOT23-6 NON-IPC DIODES" [mm]
  rect 1x0.55 smd mask+0: 1(-1.4,0.95)
  rrect50% 1x0.55 smd mask+0: 2(-1.4,0) 3(-1.4,-0.95) 4(1.4,-0.95) 5(1.4,0) 6(1.4,0.95)
  silkscreen extent -1.53,-1.55 0.5,1.93, body extent -1.49,-1.54 1.51,1.56, height 1.4
SOT95P245X110-3N [mm] "SOT23, 3-Leads, Body 2.90x2.45mm, Pitch 0.95mm, IPC Medium Density"
  rect 1x0.6 smd: 1(-1.2,0.95) 2(-1.2,-0.95) 3(1.2,0)
  silkscreen extent -1.85,-1.5 0.7,1.92, body extent -0.7,-1.5 0.7,1.5, height 1.1
SOT95P280X145-5N [mm]
  rrect25% 1.21x0.59 smd: 1(-1.255,0.95) 2(-1.255,0) 3(-1.255,-0.95) 4(1.255,-0.95) 5(1.255,0.95)
  silkscreen extent -2.85,-1.45 0.8,1.45, body extent -1.4,-1.45 1.4,1.45, height 1.45
"SOT363-6 MID DENSITY" [mm] "Technically non-IPC, adapted from TI datasheet for SOTx311 chips"
  rect 0.9x0.4 smd paste+0 mask+0: 1(-1.1,0.65)
  rrect25% 0.9x0.4 smd paste+0 mask+0: 2(-1.1,0) 3(-1.1,-0.65) 4(1.1,-0.65) 5(1.1,0) 6(1.1,0.65)
  silkscreen extent -1.17,-1.22 0.7,1.33, body extent -1.05,-1 1.05,1, height 1
SOT563 [mm]
  rect 0.6x0.35 smd: 1(-0.925,0.5) 2(-0.925,0) 3(-0.925,-0.5) 4(0.925,-0.5) 5(0.925,0) 6(0.925,0.5)
  silkscreen extent -1.05,-0.85 0.25,1.35, body extent -0.95,-0.85 0.95,0.85, height 0.6
"TESTPOINT THT" [mm]
  round 1 hole 0.5: 1(0,0)
USB_MINIB_RIGHTANGLE [mm]
  round 1.2 hole 0.75: 1(-1.6,5.05) 2(-0.8,3.85) 3(0,5.05) 4(0.8,3.85) 5(1.6,5.05)
  oval 1.258x2.516 hole 0.75 slot 1.95 at 90 deg: 6(-3.65,0) 6(3.65,0)
  silkscreen extent -3.85,-2.1 3.85,6.35, body extent -3.97,-3.75 3.93,5.65, height 3.91